# EAGLE board SparkFun Refrigerator Gas Sensor - ZMOD4450-Panel (EAGLE 9.6.0), part 1 of 4
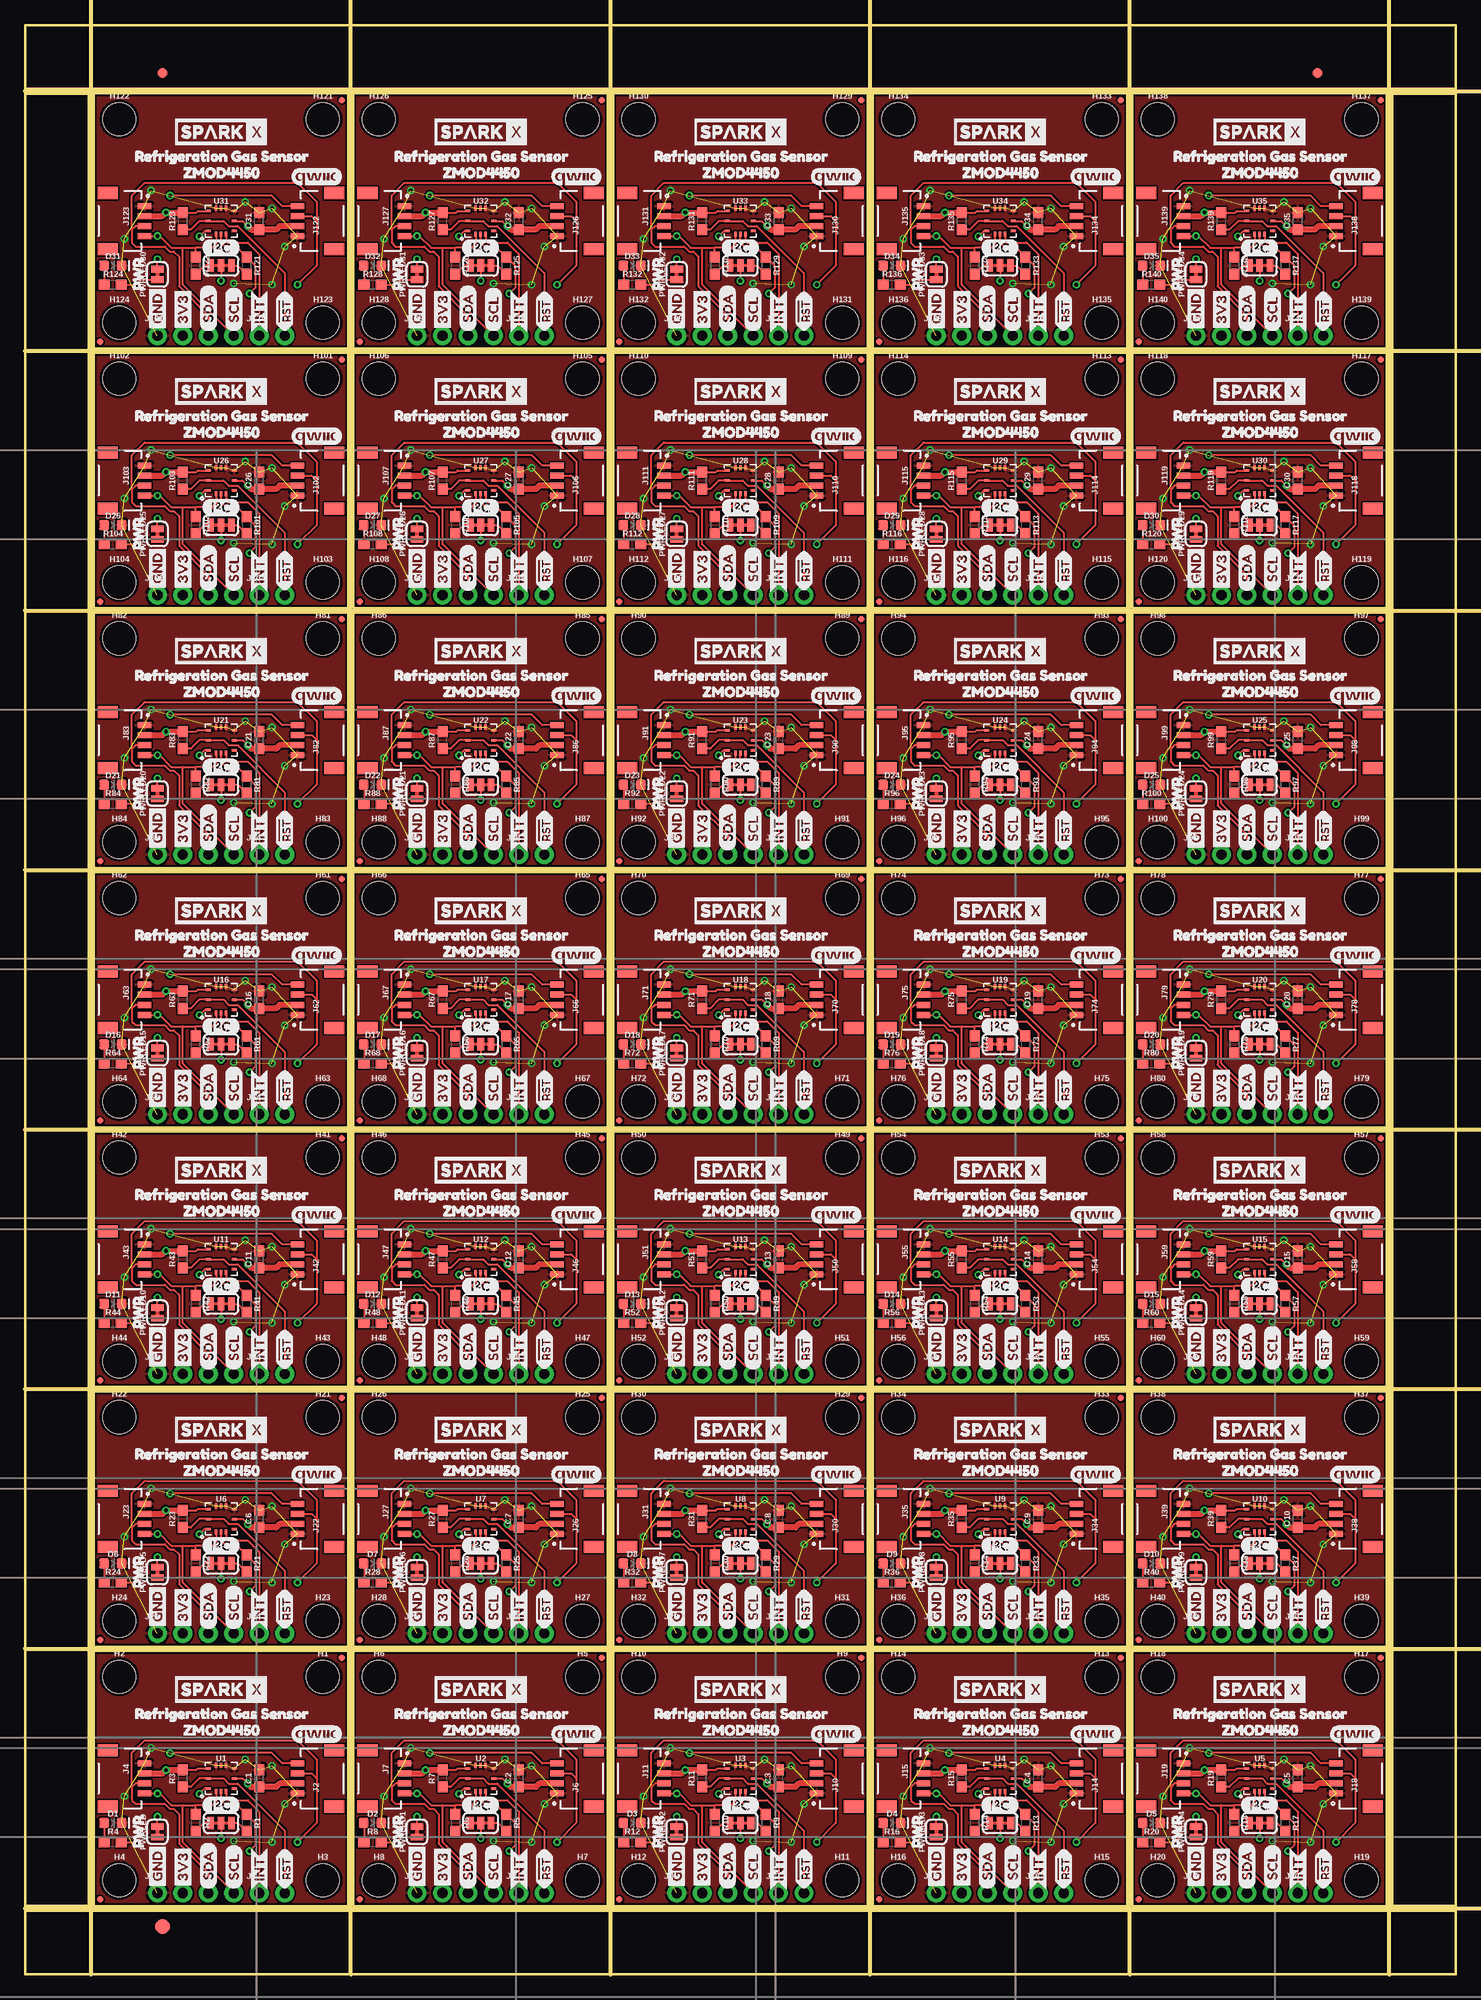
[diagram p0: board, top side]
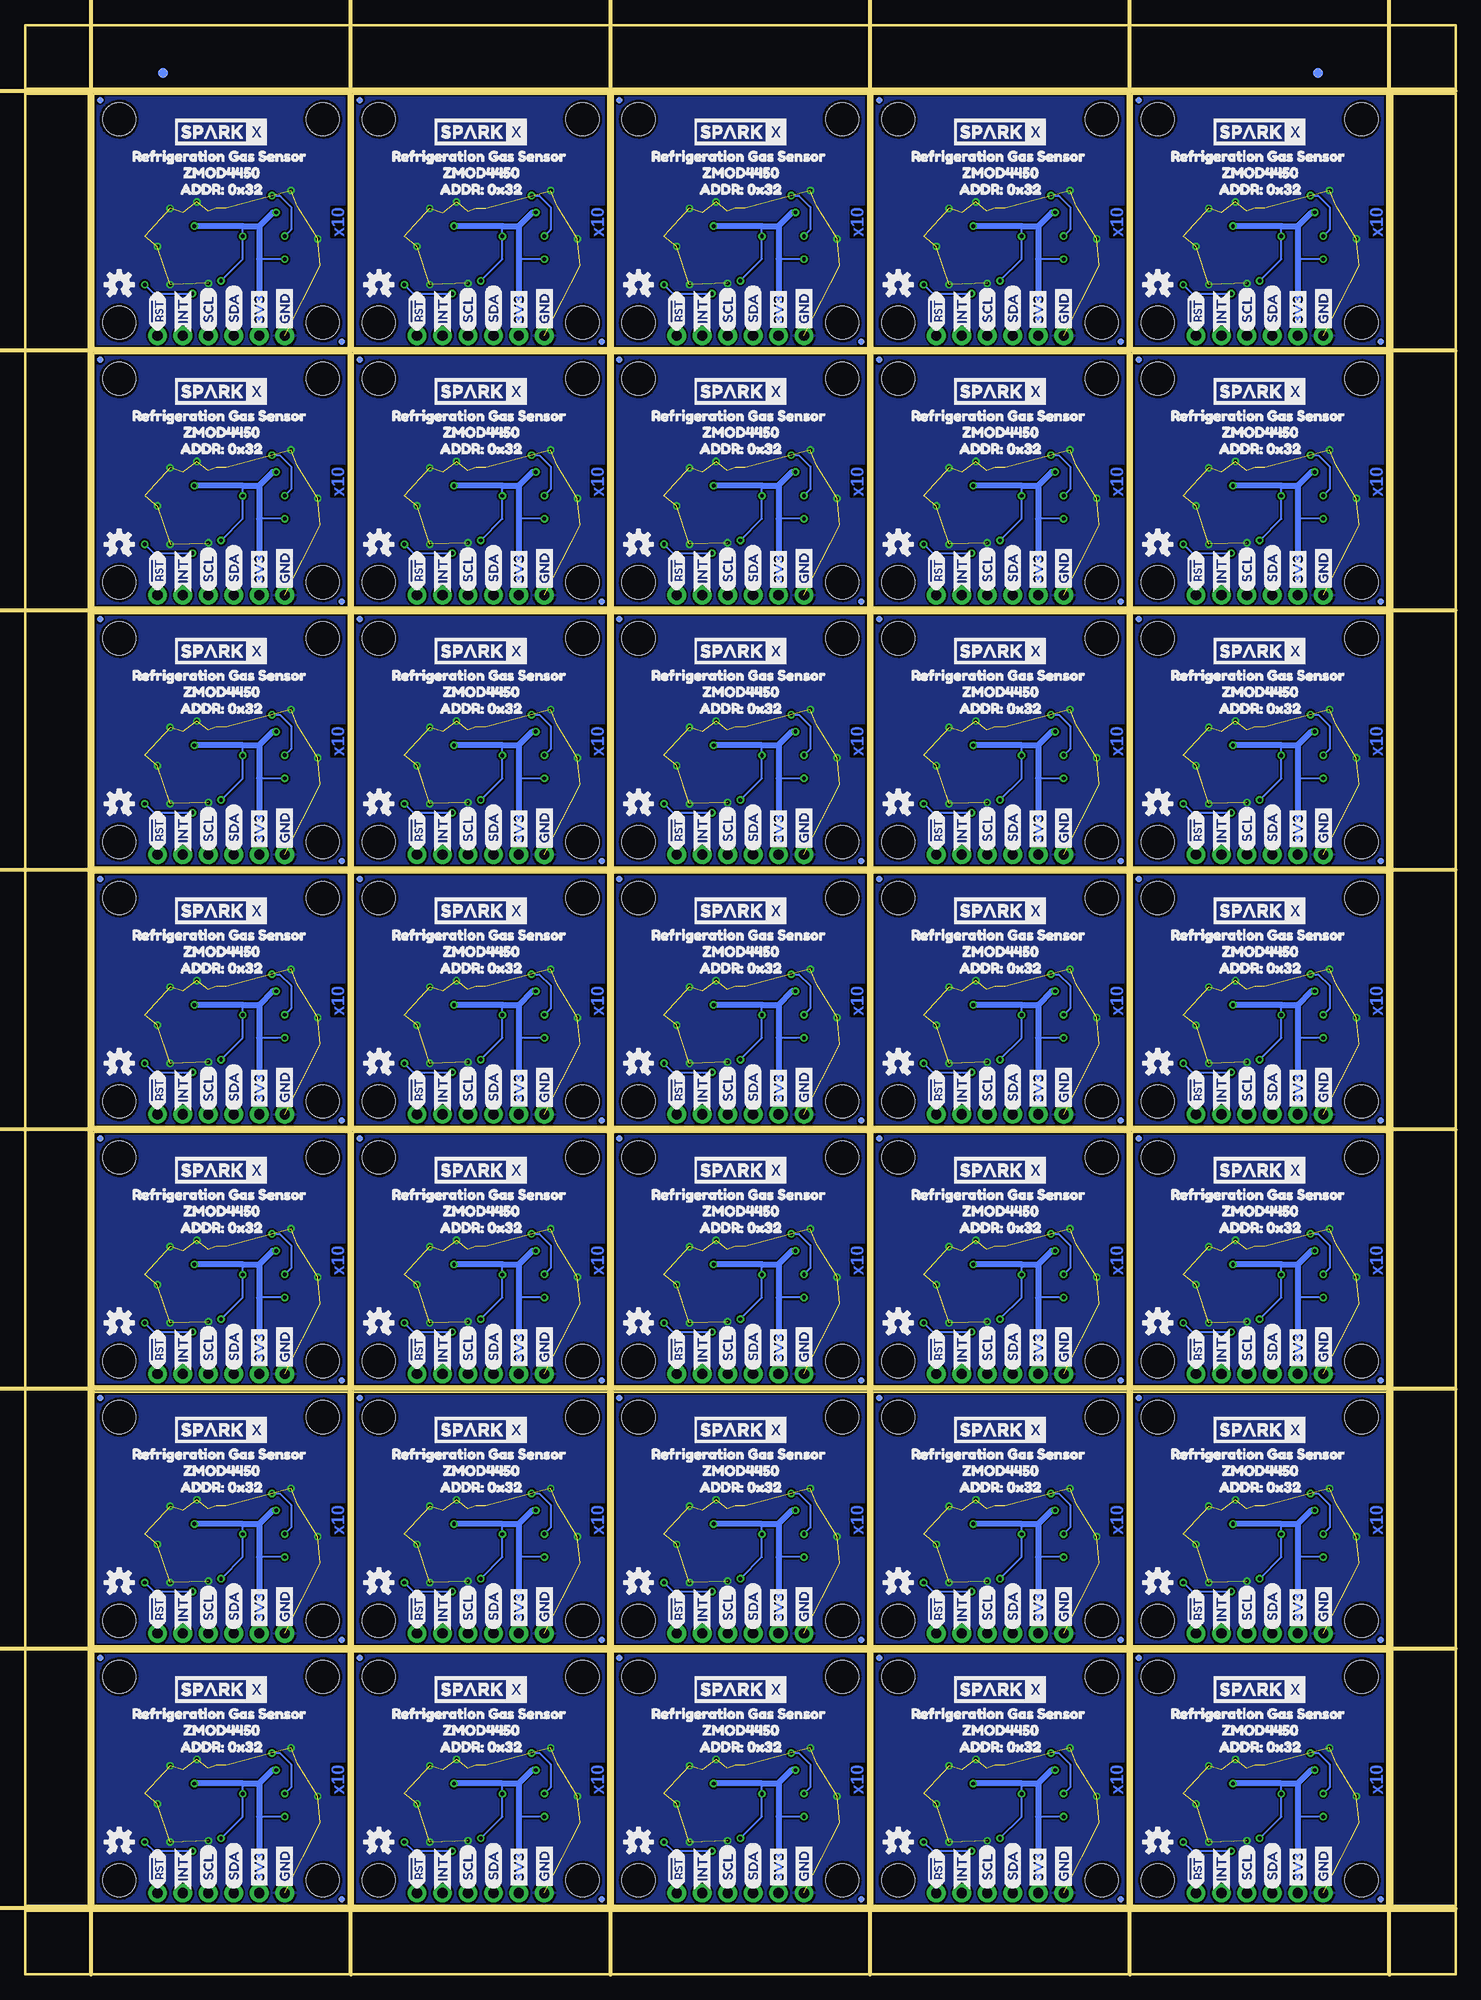
[diagram p1: board, bottom side, seen from below]

Size 142.75 x 194.56 mm. Coordinates in mm from the lower left corner, seen from the top.
Outline: 6.86,6.86 32.26,6.86 32.26,32.26 6.86,32.26 6.86,6.86
Outline: 32.77,6.86 58.17,6.86 58.17,32.26 32.77,32.26 32.77,6.86
Outline: 58.67,6.86 84.07,6.86 84.07,32.26 58.67,32.26 58.67,6.86
Outline: 84.58,6.86 109.98,6.86 109.98,32.26 84.58,32.26 84.58,6.86
Outline: 110.49,6.86 135.89,6.86 135.89,32.26 110.49,32.26 110.49,6.86
Outline: 6.86,32.77 32.26,32.77 32.26,58.17 6.86,58.17 6.86,32.77
Outline: 32.77,32.77 58.17,32.77 58.17,58.17 32.77,58.17 32.77,32.77
Outline: 58.67,32.77 84.07,32.77 84.07,58.17 58.67,58.17 58.67,32.77
Outline: 84.58,32.77 109.98,32.77 109.98,58.17 84.58,58.17 84.58,32.77
Outline: 110.49,32.77 135.89,32.77 135.89,58.17 110.49,58.17 110.49,32.77
Outline: 6.86,58.67 32.26,58.67 32.26,84.07 6.86,84.07 6.86,58.67
Outline: 32.77,58.67 58.17,58.67 58.17,84.07 32.77,84.07 32.77,58.67
Outline: 58.67,58.67 84.07,58.67 84.07,84.07 58.67,84.07 58.67,58.67
Outline: 84.58,58.67 109.98,58.67 109.98,84.07 84.58,84.07 84.58,58.67
Outline: 110.49,58.67 135.89,58.67 135.89,84.07 110.49,84.07 110.49,58.67
Outline: 6.86,84.58 32.26,84.58 32.26,109.98 6.86,109.98 6.86,84.58
Outline: 32.77,84.58 58.17,84.58 58.17,109.98 32.77,109.98 32.77,84.58
Outline: 58.67,84.58 84.07,84.58 84.07,109.98 58.67,109.98 58.67,84.58
Outline: 84.58,84.58 109.98,84.58 109.98,109.98 84.58,109.98 84.58,84.58
Outline: 110.49,84.58 135.89,84.58 135.89,109.98 110.49,109.98 110.49,84.58
Outline: 6.86,110.49 32.26,110.49 32.26,135.89 6.86,135.89 6.86,110.49
Outline: 32.77,110.49 58.17,110.49 58.17,135.89 32.77,135.89 32.77,110.49
Outline: 58.67,110.49 84.07,110.49 84.07,135.89 58.67,135.89 58.67,110.49
Outline: 84.58,110.49 109.98,110.49 109.98,135.89 84.58,135.89 84.58,110.49
Outline: 110.49,110.49 135.89,110.49 135.89,135.89 110.49,135.89 110.49,110.49
Outline: 6.86,136.4 32.26,136.4 32.26,161.8 6.86,161.8 6.86,136.4
Outline: 32.77,136.4 58.17,136.4 58.17,161.8 32.77,161.8 32.77,136.4
Outline: 58.67,136.4 84.07,136.4 84.07,161.8 58.67,161.8 58.67,136.4
Outline: 84.58,136.4 109.98,136.4 109.98,161.8 84.58,161.8 84.58,136.4
Outline: 110.49,136.4 135.89,136.4 135.89,161.8 110.49,161.8 110.49,136.4
Outline: 6.86,162.31 32.26,162.31 32.26,187.71 6.86,187.71 6.86,162.31
Outline: 32.77,162.31 58.17,162.31 58.17,187.71 32.77,187.71 32.77,162.31
Outline: 58.67,162.31 84.07,162.31 84.07,187.71 58.67,187.71 58.67,162.31
Outline: 84.58,162.31 109.98,162.31 109.98,187.71 84.58,187.71 84.58,162.31
Outline: 110.49,162.31 135.89,162.31 135.89,187.71 110.49,187.71 110.49,162.31
Outline: 0,6.35 142.75,6.35 142.75,0 0,0 0,6.35
Outline: 136.4,187.71 142.75,187.71 142.75,6.86 136.4,6.86 136.4,187.71
Outline: 0,194.56 142.75,194.56 142.75,188.21 0,188.21 0,194.56
Outline: 0,187.71 6.35,187.71 6.35,6.86 0,6.86 0,187.71
Copper layers (1*16): Top 0.035mm / dielectric 1.5mm / Bottom 0.035mm
Design rules "SparkFun": minimum track width 7mil, minimum drill 15mil, track to track 7mil, track to pad 7mil, pad to pad 7mil, via to via 7mil, smd to smd 7mil, copper to edge 7mil, drill to drill 7mil, minimum pad ring 7mil, minimum via ring 7mil, stop-mask expansion 4mil, vias tented up to drill 25mil, thermal gap 10mil
Milling: 14 lines

## Footprints (pad centres in the part's own frame; a part is rotated, then mirrored left to right if it is on the bottom)
0603 = smd 1.1 x 1: 1 -0.85,0; 2 0.85,0
LED-0603 = smd 1 x 1: A -0.877,0; C 0.877,0
FIDUCIAL-1X2 = smd 1 x 1: 1 0,0
FIDUCIAL-1.5X3 = smd 1.5 x 1.5: 1 0,0
FIDUCIAL-MICRO = smd 0.635 x 0.635: 1 0,0
STAND-OFF = hole 3.302: 0,0
SMT-JUMPER_3_2-NC_TRACE_SILK = smd 0.66 x 1.27: 1 -1.041,0; 2 0,0; 3 1.041,0
1X04_NO_SILK = drill 1.016 pad 1.88: 1 0,0; 2 2.54,0; 3 5.08,0; 4 7.62,0
JST04_1MM_RA = smd 0.6 x 1.35: 1 -1.5,0; 2 -0.5,0; 3 0.5,0; 4 1.5,0 | smd 1.2 x 2: NC1 2.8,-3.675; NC2 -2.8,-3.675
1X02_NO_SILK = drill 1.016 pad 1.88: 1 0,0; 2 2.54,0
SMT-JUMPER_2_NC_TRACE_SILK = smd 0.66 x 1.27: 1 -0.521,0; 2 0.521,0
LGA-12-3X3 = smd 0.25 x 0.5: 1 -0.5,-1.3; 2 0,-1.3; 3 0.5,-1.3; 7 0.5,1.3; 8 0,1.3; 9 -0.5,1.3 | smd 0.5 x 0.25: 4 1.3,-1; 5 1.3,0; 6 1.3,1; 10 -1.3,1; 11 -1.3,0; 12 -1.3,-1

## Placement (x,y rotation side)
C1  0.1uF  [0603]  23.37,19.56 90 top
C2  0.1uF  [0603]  49.28,19.56 90 top
C3  0.1uF  [0603]  75.18,19.56 90 top
C4  0.1uF  [0603]  101.09,19.56 90 top
C5  0.1uF  [0603]  127,19.56 90 top
C6  0.1uF  [0603]  23.37,45.47 90 top
C7  0.1uF  [0603]  49.28,45.47 90 top
C8  0.1uF  [0603]  75.18,45.47 90 top
C9  0.1uF  [0603]  101.09,45.47 90 top
C10  0.1uF  [0603]  127,45.47 90 top
C11  0.1uF  [0603]  23.37,71.37 90 top
C12  0.1uF  [0603]  49.28,71.37 90 top
C13  0.1uF  [0603]  75.18,71.37 90 top
C14  0.1uF  [0603]  101.09,71.37 90 top
C15  0.1uF  [0603]  127,71.37 90 top
C16  0.1uF  [0603]  23.37,97.28 90 top
C17  0.1uF  [0603]  49.28,97.28 90 top
C18  0.1uF  [0603]  75.18,97.28 90 top
C19  0.1uF  [0603]  101.09,97.28 90 top
C20  0.1uF  [0603]  127,97.28 90 top
C21  0.1uF  [0603]  23.37,123.19 90 top
C22  0.1uF  [0603]  49.28,123.19 90 top
C23  0.1uF  [0603]  75.18,123.19 90 top
C24  0.1uF  [0603]  101.09,123.19 90 top
C25  0.1uF  [0603]  127,123.19 90 top
C26  0.1uF  [0603]  23.37,149.1 90 top
C27  0.1uF  [0603]  49.28,149.1 90 top
C28  0.1uF  [0603]  75.18,149.1 90 top
C29  0.1uF  [0603]  101.09,149.1 90 top
C30  0.1uF  [0603]  127,149.1 90 top
C31  0.1uF  [0603]  23.37,175.01 90 top
C32  0.1uF  [0603]  49.28,175.01 90 top
C33  0.1uF  [0603]  75.18,175.01 90 top
C34  0.1uF  [0603]  101.09,175.01 90 top
C35  0.1uF  [0603]  127,175.01 90 top
D1  RED  [LED-0603]  8.76,15.11 0 top
D2  RED  [LED-0603]  34.67,15.11 0 top
D3  RED  [LED-0603]  60.58,15.11 0 top
D4  RED  [LED-0603]  86.49,15.11 0 top
D5  RED  [LED-0603]  112.4,15.11 0 top
D6  RED  [LED-0603]  8.76,41.02 0 top
D7  RED  [LED-0603]  34.67,41.02 0 top
D8  RED  [LED-0603]  60.58,41.02 0 top
D9  RED  [LED-0603]  86.49,41.02 0 top
D10  RED  [LED-0603]  112.4,41.02 0 top
D11  RED  [LED-0603]  8.76,66.93 0 top
D12  RED  [LED-0603]  34.67,66.93 0 top
D13  RED  [LED-0603]  60.58,66.93 0 top
D14  RED  [LED-0603]  86.49,66.93 0 top
D15  RED  [LED-0603]  112.4,66.93 0 top
D16  RED  [LED-0603]  8.76,92.84 0 top
D17  RED  [LED-0603]  34.67,92.84 0 top
D18  RED  [LED-0603]  60.58,92.84 0 top
D19  RED  [LED-0603]  86.49,92.84 0 top
D20  RED  [LED-0603]  112.4,92.84 0 top
D21  RED  [LED-0603]  8.76,118.75 0 top
D22  RED  [LED-0603]  34.67,118.75 0 top
D23  RED  [LED-0603]  60.58,118.75 0 top
D24  RED  [LED-0603]  86.49,118.75 0 top
D25  RED  [LED-0603]  112.4,118.75 0 top
D26  RED  [LED-0603]  8.76,144.65 0 top
D27  RED  [LED-0603]  34.67,144.65 0 top
D28  RED  [LED-0603]  60.58,144.65 0 top
D29  RED  [LED-0603]  86.49,144.65 0 top
D30  RED  [LED-0603]  112.4,144.65 0 top
D31  RED  [LED-0603]  8.76,170.56 0 top
D32  RED  [LED-0603]  34.67,170.56 0 top
D33  RED  [LED-0603]  60.58,170.56 0 top
D34  RED  [LED-0603]  86.49,170.56 0 top
D35  RED  [LED-0603]  112.4,170.56 0 top
E$1  [FIDUCIAL-1X2]  13.72,189.8 0 top
E$2  [FIDUCIAL-1X2]  13.72,189.8 0 bottom
E$3  [FIDUCIAL-1X2]  128.97,189.8 0 top
E$4  [FIDUCIAL-1X2]  128.97,189.8 0 bottom
E$5  [FIDUCIAL-1.5X3]  13.72,4.76 0 top
FD1  FIDUCIALUFIDUCIAL  [FIDUCIAL-MICRO]  31.62,31.62 0 top
FD2  FIDUCIALUFIDUCIAL  [FIDUCIAL-MICRO]  7.49,7.49 0 bottom
FD3  FIDUCIALUFIDUCIAL  [FIDUCIAL-MICRO]  7.49,7.49 0 top
FD4  FIDUCIALUFIDUCIAL  [FIDUCIAL-MICRO]  31.62,31.62 0 bottom
FD5  FIDUCIALUFIDUCIAL  [FIDUCIAL-MICRO]  57.53,31.62 0 top
FD6  FIDUCIALUFIDUCIAL  [FIDUCIAL-MICRO]  33.4,7.49 0 bottom
FD7  FIDUCIALUFIDUCIAL  [FIDUCIAL-MICRO]  33.4,7.49 0 top
FD8  FIDUCIALUFIDUCIAL  [FIDUCIAL-MICRO]  57.53,31.62 0 bottom
FD9  FIDUCIALUFIDUCIAL  [FIDUCIAL-MICRO]  83.44,31.62 0 top
FD10  FIDUCIALUFIDUCIAL  [FIDUCIAL-MICRO]  59.31,7.49 0 bottom
FD11  FIDUCIALUFIDUCIAL  [FIDUCIAL-MICRO]  59.31,7.49 0 top
FD12  FIDUCIALUFIDUCIAL  [FIDUCIAL-MICRO]  83.44,31.62 0 bottom
FD13  FIDUCIALUFIDUCIAL  [FIDUCIAL-MICRO]  109.35,31.62 0 top
FD14  FIDUCIALUFIDUCIAL  [FIDUCIAL-MICRO]  85.22,7.49 0 bottom
FD15  FIDUCIALUFIDUCIAL  [FIDUCIAL-MICRO]  85.22,7.49 0 top
FD16  FIDUCIALUFIDUCIAL  [FIDUCIAL-MICRO]  109.35,31.62 0 bottom
FD17  FIDUCIALUFIDUCIAL  [FIDUCIAL-MICRO]  135.25,31.62 0 top
FD18  FIDUCIALUFIDUCIAL  [FIDUCIAL-MICRO]  111.12,7.49 0 bottom
FD19  FIDUCIALUFIDUCIAL  [FIDUCIAL-MICRO]  111.12,7.49 0 top
FD20  FIDUCIALUFIDUCIAL  [FIDUCIAL-MICRO]  135.25,31.62 0 bottom
FD21  FIDUCIALUFIDUCIAL  [FIDUCIAL-MICRO]  31.62,57.53 0 top
FD22  FIDUCIALUFIDUCIAL  [FIDUCIAL-MICRO]  7.49,33.4 0 bottom
FD23  FIDUCIALUFIDUCIAL  [FIDUCIAL-MICRO]  7.49,33.4 0 top
FD24  FIDUCIALUFIDUCIAL  [FIDUCIAL-MICRO]  31.62,57.53 0 bottom
FD25  FIDUCIALUFIDUCIAL  [FIDUCIAL-MICRO]  57.53,57.53 0 top
FD26  FIDUCIALUFIDUCIAL  [FIDUCIAL-MICRO]  33.4,33.4 0 bottom
FD27  FIDUCIALUFIDUCIAL  [FIDUCIAL-MICRO]  33.4,33.4 0 top
FD28  FIDUCIALUFIDUCIAL  [FIDUCIAL-MICRO]  57.53,57.53 0 bottom
FD29  FIDUCIALUFIDUCIAL  [FIDUCIAL-MICRO]  83.44,57.53 0 top
FD30  FIDUCIALUFIDUCIAL  [FIDUCIAL-MICRO]  59.31,33.4 0 bottom
FD31  FIDUCIALUFIDUCIAL  [FIDUCIAL-MICRO]  59.31,33.4 0 top
FD32  FIDUCIALUFIDUCIAL  [FIDUCIAL-MICRO]  83.44,57.53 0 bottom
FD33  FIDUCIALUFIDUCIAL  [FIDUCIAL-MICRO]  109.35,57.53 0 top
FD34  FIDUCIALUFIDUCIAL  [FIDUCIAL-MICRO]  85.22,33.4 0 bottom
FD35  FIDUCIALUFIDUCIAL  [FIDUCIAL-MICRO]  85.22,33.4 0 top
FD36  FIDUCIALUFIDUCIAL  [FIDUCIAL-MICRO]  109.35,57.53 0 bottom
FD37  FIDUCIALUFIDUCIAL  [FIDUCIAL-MICRO]  135.25,57.53 0 top
FD38  FIDUCIALUFIDUCIAL  [FIDUCIAL-MICRO]  111.12,33.4 0 bottom
FD39  FIDUCIALUFIDUCIAL  [FIDUCIAL-MICRO]  111.12,33.4 0 top
FD40  FIDUCIALUFIDUCIAL  [FIDUCIAL-MICRO]  135.25,57.53 0 bottom
FD41  FIDUCIALUFIDUCIAL  [FIDUCIAL-MICRO]  31.62,83.44 0 top
FD42  FIDUCIALUFIDUCIAL  [FIDUCIAL-MICRO]  7.49,59.31 0 bottom
FD43  FIDUCIALUFIDUCIAL  [FIDUCIAL-MICRO]  7.49,59.31 0 top
FD44  FIDUCIALUFIDUCIAL  [FIDUCIAL-MICRO]  31.62,83.44 0 bottom
FD45  FIDUCIALUFIDUCIAL  [FIDUCIAL-MICRO]  57.53,83.44 0 top
FD46  FIDUCIALUFIDUCIAL  [FIDUCIAL-MICRO]  33.4,59.31 0 bottom
FD47  FIDUCIALUFIDUCIAL  [FIDUCIAL-MICRO]  33.4,59.31 0 top
FD48  FIDUCIALUFIDUCIAL  [FIDUCIAL-MICRO]  57.53,83.44 0 bottom
FD49  FIDUCIALUFIDUCIAL  [FIDUCIAL-MICRO]  83.44,83.44 0 top
FD50  FIDUCIALUFIDUCIAL  [FIDUCIAL-MICRO]  59.31,59.31 0 bottom
FD51  FIDUCIALUFIDUCIAL  [FIDUCIAL-MICRO]  59.31,59.31 0 top
FD52  FIDUCIALUFIDUCIAL  [FIDUCIAL-MICRO]  83.44,83.44 0 bottom
FD53  FIDUCIALUFIDUCIAL  [FIDUCIAL-MICRO]  109.35,83.44 0 top
FD54  FIDUCIALUFIDUCIAL  [FIDUCIAL-MICRO]  85.22,59.31 0 bottom
FD55  FIDUCIALUFIDUCIAL  [FIDUCIAL-MICRO]  85.22,59.31 0 top
FD56  FIDUCIALUFIDUCIAL  [FIDUCIAL-MICRO]  109.35,83.44 0 bottom
FD57  FIDUCIALUFIDUCIAL  [FIDUCIAL-MICRO]  135.25,83.44 0 top
FD58  FIDUCIALUFIDUCIAL  [FIDUCIAL-MICRO]  111.12,59.31 0 bottom
FD59  FIDUCIALUFIDUCIAL  [FIDUCIAL-MICRO]  111.12,59.31 0 top
FD60  FIDUCIALUFIDUCIAL  [FIDUCIAL-MICRO]  135.25,83.44 0 bottom
FD61  FIDUCIALUFIDUCIAL  [FIDUCIAL-MICRO]  31.62,109.35 0 top
FD62  FIDUCIALUFIDUCIAL  [FIDUCIAL-MICRO]  7.49,85.22 0 bottom
FD63  FIDUCIALUFIDUCIAL  [FIDUCIAL-MICRO]  7.49,85.22 0 top
FD64  FIDUCIALUFIDUCIAL  [FIDUCIAL-MICRO]  31.62,109.35 0 bottom
FD65  FIDUCIALUFIDUCIAL  [FIDUCIAL-MICRO]  57.53,109.35 0 top
FD66  FIDUCIALUFIDUCIAL  [FIDUCIAL-MICRO]  33.4,85.22 0 bottom
FD67  FIDUCIALUFIDUCIAL  [FIDUCIAL-MICRO]  33.4,85.22 0 top
FD68  FIDUCIALUFIDUCIAL  [FIDUCIAL-MICRO]  57.53,109.35 0 bottom
FD69  FIDUCIALUFIDUCIAL  [FIDUCIAL-MICRO]  83.44,109.35 0 top
FD70  FIDUCIALUFIDUCIAL  [FIDUCIAL-MICRO]  59.31,85.22 0 bottom
FD71  FIDUCIALUFIDUCIAL  [FIDUCIAL-MICRO]  59.31,85.22 0 top
FD72  FIDUCIALUFIDUCIAL  [FIDUCIAL-MICRO]  83.44,109.35 0 bottom
FD73  FIDUCIALUFIDUCIAL  [FIDUCIAL-MICRO]  109.35,109.35 0 top
FD74  FIDUCIALUFIDUCIAL  [FIDUCIAL-MICRO]  85.22,85.22 0 bottom
FD75  FIDUCIALUFIDUCIAL  [FIDUCIAL-MICRO]  85.22,85.22 0 top
FD76  FIDUCIALUFIDUCIAL  [FIDUCIAL-MICRO]  109.35,109.35 0 bottom
FD77  FIDUCIALUFIDUCIAL  [FIDUCIAL-MICRO]  135.25,109.35 0 top
FD78  FIDUCIALUFIDUCIAL  [FIDUCIAL-MICRO]  111.12,85.22 0 bottom
FD79  FIDUCIALUFIDUCIAL  [FIDUCIAL-MICRO]  111.12,85.22 0 top
FD80  FIDUCIALUFIDUCIAL  [FIDUCIAL-MICRO]  135.25,109.35 0 bottom
FD81  FIDUCIALUFIDUCIAL  [FIDUCIAL-MICRO]  31.62,135.25 0 top
FD82  FIDUCIALUFIDUCIAL  [FIDUCIAL-MICRO]  7.49,111.12 0 bottom
FD83  FIDUCIALUFIDUCIAL  [FIDUCIAL-MICRO]  7.49,111.12 0 top
FD84  FIDUCIALUFIDUCIAL  [FIDUCIAL-MICRO]  31.62,135.25 0 bottom
FD85  FIDUCIALUFIDUCIAL  [FIDUCIAL-MICRO]  57.53,135.25 0 top
FD86  FIDUCIALUFIDUCIAL  [FIDUCIAL-MICRO]  33.4,111.12 0 bottom
FD87  FIDUCIALUFIDUCIAL  [FIDUCIAL-MICRO]  33.4,111.12 0 top
FD88  FIDUCIALUFIDUCIAL  [FIDUCIAL-MICRO]  57.53,135.25 0 bottom
FD89  FIDUCIALUFIDUCIAL  [FIDUCIAL-MICRO]  83.44,135.25 0 top
FD90  FIDUCIALUFIDUCIAL  [FIDUCIAL-MICRO]  59.31,111.12 0 bottom
FD91  FIDUCIALUFIDUCIAL  [FIDUCIAL-MICRO]  59.31,111.12 0 top
FD92  FIDUCIALUFIDUCIAL  [FIDUCIAL-MICRO]  83.44,135.25 0 bottom
FD93  FIDUCIALUFIDUCIAL  [FIDUCIAL-MICRO]  109.35,135.25 0 top
FD94  FIDUCIALUFIDUCIAL  [FIDUCIAL-MICRO]  85.22,111.12 0 bottom
FD95  FIDUCIALUFIDUCIAL  [FIDUCIAL-MICRO]  85.22,111.12 0 top
FD96  FIDUCIALUFIDUCIAL  [FIDUCIAL-MICRO]  109.35,135.25 0 bottom
FD97  FIDUCIALUFIDUCIAL  [FIDUCIAL-MICRO]  135.25,135.25 0 top
FD98  FIDUCIALUFIDUCIAL  [FIDUCIAL-MICRO]  111.12,111.12 0 bottom
FD99  FIDUCIALUFIDUCIAL  [FIDUCIAL-MICRO]  111.12,111.12 0 top
FD100  FIDUCIALUFIDUCIAL  [FIDUCIAL-MICRO]  135.25,135.25 0 bottom
FD101  FIDUCIALUFIDUCIAL  [FIDUCIAL-MICRO]  31.62,161.16 0 top
FD102  FIDUCIALUFIDUCIAL  [FIDUCIAL-MICRO]  7.49,137.03 0 bottom
FD103  FIDUCIALUFIDUCIAL  [FIDUCIAL-MICRO]  7.49,137.03 0 top
FD104  FIDUCIALUFIDUCIAL  [FIDUCIAL-MICRO]  31.62,161.16 0 bottom
FD105  FIDUCIALUFIDUCIAL  [FIDUCIAL-MICRO]  57.53,161.16 0 top
FD106  FIDUCIALUFIDUCIAL  [FIDUCIAL-MICRO]  33.4,137.03 0 bottom
FD107  FIDUCIALUFIDUCIAL  [FIDUCIAL-MICRO]  33.4,137.03 0 top
FD108  FIDUCIALUFIDUCIAL  [FIDUCIAL-MICRO]  57.53,161.16 0 bottom
FD109  FIDUCIALUFIDUCIAL  [FIDUCIAL-MICRO]  83.44,161.16 0 top
FD110  FIDUCIALUFIDUCIAL  [FIDUCIAL-MICRO]  59.31,137.03 0 bottom
FD111  FIDUCIALUFIDUCIAL  [FIDUCIAL-MICRO]  59.31,137.03 0 top
FD112  FIDUCIALUFIDUCIAL  [FIDUCIAL-MICRO]  83.44,161.16 0 bottom
FD113  FIDUCIALUFIDUCIAL  [FIDUCIAL-MICRO]  109.35,161.16 0 top
FD114  FIDUCIALUFIDUCIAL  [FIDUCIAL-MICRO]  85.22,137.03 0 bottom
FD115  FIDUCIALUFIDUCIAL  [FIDUCIAL-MICRO]  85.22,137.03 0 top
FD116  FIDUCIALUFIDUCIAL  [FIDUCIAL-MICRO]  109.35,161.16 0 bottom
FD117  FIDUCIALUFIDUCIAL  [FIDUCIAL-MICRO]  135.25,161.16 0 top
FD118  FIDUCIALUFIDUCIAL  [FIDUCIAL-MICRO]  111.12,137.03 0 bottom
FD119  FIDUCIALUFIDUCIAL  [FIDUCIAL-MICRO]  111.12,137.03 0 top
FD120  FIDUCIALUFIDUCIAL  [FIDUCIAL-MICRO]  135.25,161.16 0 bottom
FD121  FIDUCIALUFIDUCIAL  [FIDUCIAL-MICRO]  31.62,187.07 0 top
FD122  FIDUCIALUFIDUCIAL  [FIDUCIAL-MICRO]  7.49,162.94 0 bottom
FD123  FIDUCIALUFIDUCIAL  [FIDUCIAL-MICRO]  7.49,162.94 0 top
FD124  FIDUCIALUFIDUCIAL  [FIDUCIAL-MICRO]  31.62,187.07 0 bottom
FD125  FIDUCIALUFIDUCIAL  [FIDUCIAL-MICRO]  57.53,187.07 0 top
FD126  FIDUCIALUFIDUCIAL  [FIDUCIAL-MICRO]  33.4,162.94 0 bottom
FD127  FIDUCIALUFIDUCIAL  [FIDUCIAL-MICRO]  33.4,162.94 0 top
FD128  FIDUCIALUFIDUCIAL  [FIDUCIAL-MICRO]  57.53,187.07 0 bottom
FD129  FIDUCIALUFIDUCIAL  [FIDUCIAL-MICRO]  83.44,187.07 0 top
FD130  FIDUCIALUFIDUCIAL  [FIDUCIAL-MICRO]  59.31,162.94 0 bottom
FD131  FIDUCIALUFIDUCIAL  [FIDUCIAL-MICRO]  59.31,162.94 0 top
FD132  FIDUCIALUFIDUCIAL  [FIDUCIAL-MICRO]  83.44,187.07 0 bottom
FD133  FIDUCIALUFIDUCIAL  [FIDUCIAL-MICRO]  109.35,187.07 0 top
FD134  FIDUCIALUFIDUCIAL  [FIDUCIAL-MICRO]  85.22,162.94 0 bottom
FD135  FIDUCIALUFIDUCIAL  [FIDUCIAL-MICRO]  85.22,162.94 0 top
FD136  FIDUCIALUFIDUCIAL  [FIDUCIAL-MICRO]  109.35,187.07 0 bottom
FD137  FIDUCIALUFIDUCIAL  [FIDUCIAL-MICRO]  135.25,187.07 0 top
FD138  FIDUCIALUFIDUCIAL  [FIDUCIAL-MICRO]  111.12,162.94 0 bottom
FD139  FIDUCIALUFIDUCIAL  [FIDUCIAL-MICRO]  111.12,162.94 0 top
FD140  FIDUCIALUFIDUCIAL  [FIDUCIAL-MICRO]  135.25,187.07 0 bottom
FRAME1  FRAME-LETTER  [CREATIVE_COMMONS]  -3.3,-2.03 0 top  (outside the outline)
FRAME2  FRAME-LETTER  [CREATIVE_COMMONS]  22.61,-2.03 0 top
FRAME3  FRAME-LETTER  [CREATIVE_COMMONS]  48.51,-2.03 0 top
FRAME4  FRAME-LETTER  [CREATIVE_COMMONS]  74.42,-2.03 0 top
FRAME5  FRAME-LETTER  [CREATIVE_COMMONS]  100.33,-2.03 0 top
FRAME6  FRAME-LETTER  [CREATIVE_COMMONS]  -3.3,23.88 0 top  (outside the outline)
FRAME7  FRAME-LETTER  [CREATIVE_COMMONS]  22.61,23.88 0 top
FRAME8  FRAME-LETTER  [CREATIVE_COMMONS]  48.51,23.88 0 top
FRAME9  FRAME-LETTER  [CREATIVE_COMMONS]  74.42,23.88 0 top
FRAME10  FRAME-LETTER  [CREATIVE_COMMONS]  100.33,23.88 0 top
FRAME11  FRAME-LETTER  [CREATIVE_COMMONS]  -3.3,49.78 0 top  (outside the outline)
FRAME12  FRAME-LETTER  [CREATIVE_COMMONS]  22.61,49.78 0 top
FRAME13  FRAME-LETTER  [CREATIVE_COMMONS]  48.51,49.78 0 top
FRAME14  FRAME-LETTER  [CREATIVE_COMMONS]  74.42,49.78 0 top
FRAME15  FRAME-LETTER  [CREATIVE_COMMONS]  100.33,49.78 0 top
FRAME16  FRAME-LETTER  [CREATIVE_COMMONS]  -3.3,75.69 0 top  (outside the outline)
FRAME17  FRAME-LETTER  [CREATIVE_COMMONS]  22.61,75.69 0 top
FRAME18  FRAME-LETTER  [CREATIVE_COMMONS]  48.51,75.69 0 top
FRAME19  FRAME-LETTER  [CREATIVE_COMMONS]  74.42,75.69 0 top
FRAME20  FRAME-LETTER  [CREATIVE_COMMONS]  100.33,75.69 0 top
FRAME21  FRAME-LETTER  [CREATIVE_COMMONS]  -3.3,101.6 0 top  (outside the outline)
FRAME22  FRAME-LETTER  [CREATIVE_COMMONS]  22.61,101.6 0 top
FRAME23  FRAME-LETTER  [CREATIVE_COMMONS]  48.51,101.6 0 top
FRAME24  FRAME-LETTER  [CREATIVE_COMMONS]  74.42,101.6 0 top
FRAME25  FRAME-LETTER  [CREATIVE_COMMONS]  100.33,101.6 0 top
FRAME26  FRAME-LETTER  [CREATIVE_COMMONS]  -3.3,127.51 0 top  (outside the outline)
FRAME27  FRAME-LETTER  [CREATIVE_COMMONS]  22.61,127.51 0 top
FRAME28  FRAME-LETTER  [CREATIVE_COMMONS]  48.51,127.51 0 top
FRAME29  FRAME-LETTER  [CREATIVE_COMMONS]  74.42,127.51 0 top
FRAME30  FRAME-LETTER  [CREATIVE_COMMONS]  100.33,127.51 0 top
FRAME31  FRAME-LETTER  [CREATIVE_COMMONS]  -3.3,153.42 0 top  (outside the outline)
FRAME32  FRAME-LETTER  [CREATIVE_COMMONS]  22.61,153.42 0 top
FRAME33  FRAME-LETTER  [CREATIVE_COMMONS]  48.51,153.42 0 top
FRAME34  FRAME-LETTER  [CREATIVE_COMMONS]  74.42,153.42 0 top
FRAME35  FRAME-LETTER  [CREATIVE_COMMONS]  100.33,153.42 0 top
H1  STAND-OFF  [STAND-OFF]  29.72,29.72 0 top
H2  STAND-OFF  [STAND-OFF]  9.4,29.72 0 top
H3  STAND-OFF  [STAND-OFF]  29.72,9.4 0 top
H4  STAND-OFF  [STAND-OFF]  9.4,9.4 0 top
H5  STAND-OFF  [STAND-OFF]  55.63,29.72 0 top
H6  STAND-OFF  [STAND-OFF]  35.31,29.72 0 top
H7  STAND-OFF  [STAND-OFF]  55.63,9.4 0 top
H8  STAND-OFF  [STAND-OFF]  35.31,9.4 0 top
H9  STAND-OFF  [STAND-OFF]  81.53,29.72 0 top
H10  STAND-OFF  [STAND-OFF]  61.21,29.72 0 top
H11  STAND-OFF  [STAND-OFF]  81.53,9.4 0 top
H12  STAND-OFF  [STAND-OFF]  61.21,9.4 0 top
H13  STAND-OFF  [STAND-OFF]  107.44,29.72 0 top
H14  STAND-OFF  [STAND-OFF]  87.12,29.72 0 top
H15  STAND-OFF  [STAND-OFF]  107.44,9.4 0 top
H16  STAND-OFF  [STAND-OFF]  87.12,9.4 0 top
H17  STAND-OFF  [STAND-OFF]  133.35,29.72 0 top
H18  STAND-OFF  [STAND-OFF]  113.03,29.72 0 top
H19  STAND-OFF  [STAND-OFF]  133.35,9.4 0 top
H20  STAND-OFF  [STAND-OFF]  113.03,9.4 0 top
H21  STAND-OFF  [STAND-OFF]  29.72,55.63 0 top
H22  STAND-OFF  [STAND-OFF]  9.4,55.63 0 top
H23  STAND-OFF  [STAND-OFF]  29.72,35.31 0 top
H24  STAND-OFF  [STAND-OFF]  9.4,35.31 0 top
H25  STAND-OFF  [STAND-OFF]  55.63,55.63 0 top
H26  STAND-OFF  [STAND-OFF]  35.31,55.63 0 top
H27  STAND-OFF  [STAND-OFF]  55.63,35.31 0 top
H28  STAND-OFF  [STAND-OFF]  35.31,35.31 0 top
H29  STAND-OFF  [STAND-OFF]  81.53,55.63 0 top
H30  STAND-OFF  [STAND-OFF]  61.21,55.63 0 top
H31  STAND-OFF  [STAND-OFF]  81.53,35.31 0 top
H32  STAND-OFF  [STAND-OFF]  61.21,35.31 0 top
H33  STAND-OFF  [STAND-OFF]  107.44,55.63 0 top
H34  STAND-OFF  [STAND-OFF]  87.12,55.63 0 top
H35  STAND-OFF  [STAND-OFF]  107.44,35.31 0 top
H36  STAND-OFF  [STAND-OFF]  87.12,35.31 0 top
H37  STAND-OFF  [STAND-OFF]  133.35,55.63 0 top
H38  STAND-OFF  [STAND-OFF]  113.03,55.63 0 top
H39  STAND-OFF  [STAND-OFF]  133.35,35.31 0 top
H40  STAND-OFF  [STAND-OFF]  113.03,35.31 0 top
H41  STAND-OFF  [STAND-OFF]  29.72,81.53 0 top
H42  STAND-OFF  [STAND-OFF]  9.4,81.53 0 top
H43  STAND-OFF  [STAND-OFF]  29.72,61.21 0 top
H44  STAND-OFF  [STAND-OFF]  9.4,61.21 0 top
H45  STAND-OFF  [STAND-OFF]  55.63,81.53 0 top
H46  STAND-OFF  [STAND-OFF]  35.31,81.53 0 top
H47  STAND-OFF  [STAND-OFF]  55.63,61.21 0 top
H48  STAND-OFF  [STAND-OFF]  35.31,61.21 0 top
H49  STAND-OFF  [STAND-OFF]  81.53,81.53 0 top
H50  STAND-OFF  [STAND-OFF]  61.21,81.53 0 top
H51  STAND-OFF  [STAND-OFF]  81.53,61.21 0 top
H52  STAND-OFF  [STAND-OFF]  61.21,61.21 0 top
H53  STAND-OFF  [STAND-OFF]  107.44,81.53 0 top
H54  STAND-OFF  [STAND-OFF]  87.12,81.53 0 top
H55  STAND-OFF  [STAND-OFF]  107.44,61.21 0 top
H56  STAND-OFF  [STAND-OFF]  87.12,61.21 0 top
H57  STAND-OFF  [STAND-OFF]  133.35,81.53 0 top
H58  STAND-OFF  [STAND-OFF]  113.03,81.53 0 top
H59  STAND-OFF  [STAND-OFF]  133.35,61.21 0 top
H60  STAND-OFF  [STAND-OFF]  113.03,61.21 0 top
H61  STAND-OFF  [STAND-OFF]  29.72,107.44 0 top
H62  STAND-OFF  [STAND-OFF]  9.4,107.44 0 top
H63  STAND-OFF  [STAND-OFF]  29.72,87.12 0 top
H64  STAND-OFF  [STAND-OFF]  9.4,87.12 0 top
H65  STAND-OFF  [STAND-OFF]  55.63,107.44 0 top
H66  STAND-OFF  [STAND-OFF]  35.31,107.44 0 top
H67  STAND-OFF  [STAND-OFF]  55.63,87.12 0 top
H68  STAND-OFF  [STAND-OFF]  35.31,87.12 0 top
H69  STAND-OFF  [STAND-OFF]  81.53,107.44 0 top
H70  STAND-OFF  [STAND-OFF]  61.21,107.44 0 top
H71  STAND-OFF  [STAND-OFF]  81.53,87.12 0 top
H72  STAND-OFF  [STAND-OFF]  61.21,87.12 0 top
H73  STAND-OFF  [STAND-OFF]  107.44,107.44 0 top
H74  STAND-OFF  [STAND-OFF]  87.12,107.44 0 top
H75  STAND-OFF  [STAND-OFF]  107.44,87.12 0 top
H76  STAND-OFF  [STAND-OFF]  87.12,87.12 0 top
H77  STAND-OFF  [STAND-OFF]  133.35,107.44 0 top
H78  STAND-OFF  [STAND-OFF]  113.03,107.44 0 top
H79  STAND-OFF  [STAND-OFF]  133.35,87.12 0 top
H80  STAND-OFF  [STAND-OFF]  113.03,87.12 0 top
H81  STAND-OFF  [STAND-OFF]  29.72,133.35 0 top
H82  STAND-OFF  [STAND-OFF]  9.4,133.35 0 top
H83  STAND-OFF  [STAND-OFF]  29.72,113.03 0 top
H84  STAND-OFF  [STAND-OFF]  9.4,113.03 0 top
H85  STAND-OFF  [STAND-OFF]  55.63,133.35 0 top
H86  STAND-OFF  [STAND-OFF]  35.31,133.35 0 top
H87  STAND-OFF  [STAND-OFF]  55.63,113.03 0 top
H88  STAND-OFF  [STAND-OFF]  35.31,113.03 0 top
H89  STAND-OFF  [STAND-OFF]  81.53,133.35 0 top
H90  STAND-OFF  [STAND-OFF]  61.21,133.35 0 top
H91  STAND-OFF  [STAND-OFF]  81.53,113.03 0 top
H92  STAND-OFF  [STAND-OFF]  61.21,113.03 0 top
H93  STAND-OFF  [STAND-OFF]  107.44,133.35 0 top
H94  STAND-OFF  [STAND-OFF]  87.12,133.35 0 top
H95  STAND-OFF  [STAND-OFF]  107.44,113.03 0 top
H96  STAND-OFF  [STAND-OFF]  87.12,113.03 0 top
H97  STAND-OFF  [STAND-OFF]  133.35,133.35 0 top
H98  STAND-OFF  [STAND-OFF]  113.03,133.35 0 top
H99  STAND-OFF  [STAND-OFF]  133.35,113.03 0 top
H100  STAND-OFF  [STAND-OFF]  113.03,113.03 0 top
H101  STAND-OFF  [STAND-OFF]  29.72,159.26 0 top
H102  STAND-OFF  [STAND-OFF]  9.4,159.26 0 top
H103  STAND-OFF  [STAND-OFF]  29.72,138.94 0 top
H104  STAND-OFF  [STAND-OFF]  9.4,138.94 0 top
H105  STAND-OFF  [STAND-OFF]  55.63,159.26 0 top
H106  STAND-OFF  [STAND-OFF]  35.31,159.26 0 top
H107  STAND-OFF  [STAND-OFF]  55.63,138.94 0 top
H108  STAND-OFF  [STAND-OFF]  35.31,138.94 0 top
H109  STAND-OFF  [STAND-OFF]  81.53,159.26 0 top
H110  STAND-OFF  [STAND-OFF]  61.21,159.26 0 top
H111  STAND-OFF  [STAND-OFF]  81.53,138.94 0 top
H112  STAND-OFF  [STAND-OFF]  61.21,138.94 0 top
H113  STAND-OFF  [STAND-OFF]  107.44,159.26 0 top
H114  STAND-OFF  [STAND-OFF]  87.12,159.26 0 top
H115  STAND-OFF  [STAND-OFF]  107.44,138.94 0 top
H116  STAND-OFF  [STAND-OFF]  87.12,138.94 0 top
H117  STAND-OFF  [STAND-OFF]  133.35,159.26 0 top
H118  STAND-OFF  [STAND-OFF]  113.03,159.26 0 top
H119  STAND-OFF  [STAND-OFF]  133.35,138.94 0 top
H120  STAND-OFF  [STAND-OFF]  113.03,138.94 0 top
H121  STAND-OFF  [STAND-OFF]  29.72,185.17 0 top
H122  STAND-OFF  [STAND-OFF]  9.4,185.17 0 top
H123  STAND-OFF  [STAND-OFF]  29.72,164.85 0 top
H124  STAND-OFF  [STAND-OFF]  9.4,164.85 0 top
H125  STAND-OFF  [STAND-OFF]  55.63,185.17 0 top
H126  STAND-OFF  [STAND-OFF]  35.31,185.17 0 top
H127  STAND-OFF  [STAND-OFF]  55.63,164.85 0 top
H128  STAND-OFF  [STAND-OFF]  35.31,164.85 0 top
H129  STAND-OFF  [STAND-OFF]  81.53,185.17 0 top
H130  STAND-OFF  [STAND-OFF]  61.21,185.17 0 top
H131  STAND-OFF  [STAND-OFF]  81.53,164.85 0 top
H132  STAND-OFF  [STAND-OFF]  61.21,164.85 0 top
H133  STAND-OFF  [STAND-OFF]  107.44,185.17 0 top
H134  STAND-OFF  [STAND-OFF]  87.12,185.17 0 top
H135  STAND-OFF  [STAND-OFF]  107.44,164.85 0 top
H136  STAND-OFF  [STAND-OFF]  87.12,164.85 0 top
H137  STAND-OFF  [STAND-OFF]  133.35,185.17 0 top
H138  STAND-OFF  [STAND-OFF]  113.03,185.17 0 top
H139  STAND-OFF  [STAND-OFF]  133.35,164.85 0 top
H140  STAND-OFF  [STAND-OFF]  113.03,164.85 0 top
I2C  JUMPER-SMT_3_2-NC_TRACE_SILK  [SMT-JUMPER_3_2-NC_TRACE_SILK]  19.56,15.11 0 top
I2C1  JUMPER-SMT_3_2-NC_TRACE_SILK  [SMT-JUMPER_3_2-NC_TRACE_SILK]  45.47,15.11 0 top
I2C2  JUMPER-SMT_3_2-NC_TRACE_SILK  [SMT-JUMPER_3_2-NC_TRACE_SILK]  71.37,15.11 0 top
I2C3  JUMPER-SMT_3_2-NC_TRACE_SILK  [SMT-JUMPER_3_2-NC_TRACE_SILK]  97.28,15.11 0 top
I2C4  JUMPER-SMT_3_2-NC_TRACE_SILK  [SMT-JUMPER_3_2-NC_TRACE_SILK]  123.19,15.11 0 top
I2C5  JUMPER-SMT_3_2-NC_TRACE_SILK  [SMT-JUMPER_3_2-NC_TRACE_SILK]  19.56,41.02 0 top
I2C6  JUMPER-SMT_3_2-NC_TRACE_SILK  [SMT-JUMPER_3_2-NC_TRACE_SILK]  45.47,41.02 0 top
I2C7  JUMPER-SMT_3_2-NC_TRACE_SILK  [SMT-JUMPER_3_2-NC_TRACE_SILK]  71.37,41.02 0 top
I2C8  JUMPER-SMT_3_2-NC_TRACE_SILK  [SMT-JUMPER_3_2-NC_TRACE_SILK]  97.28,41.02 0 top
I2C9  JUMPER-SMT_3_2-NC_TRACE_SILK  [SMT-JUMPER_3_2-NC_TRACE_SILK]  123.19,41.02 0 top
I2C10  JUMPER-SMT_3_2-NC_TRACE_SILK  [SMT-JUMPER_3_2-NC_TRACE_SILK]  19.56,66.93 0 top
I2C11  JUMPER-SMT_3_2-NC_TRACE_SILK  [SMT-JUMPER_3_2-NC_TRACE_SILK]  45.47,66.93 0 top
I2C12  JUMPER-SMT_3_2-NC_TRACE_SILK  [SMT-JUMPER_3_2-NC_TRACE_SILK]  71.37,66.93 0 top
I2C13  JUMPER-SMT_3_2-NC_TRACE_SILK  [SMT-JUMPER_3_2-NC_TRACE_SILK]  97.28,66.93 0 top
I2C14  JUMPER-SMT_3_2-NC_TRACE_SILK  [SMT-JUMPER_3_2-NC_TRACE_SILK]  123.19,66.93 0 top
I2C15  JUMPER-SMT_3_2-NC_TRACE_SILK  [SMT-JUMPER_3_2-NC_TRACE_SILK]  19.56,92.84 0 top
I2C16  JUMPER-SMT_3_2-NC_TRACE_SILK  [SMT-JUMPER_3_2-NC_TRACE_SILK]  45.47,92.84 0 top
I2C17  JUMPER-SMT_3_2-NC_TRACE_SILK  [SMT-JUMPER_3_2-NC_TRACE_SILK]  71.37,92.84 0 top
I2C18  JUMPER-SMT_3_2-NC_TRACE_SILK  [SMT-JUMPER_3_2-NC_TRACE_SILK]  97.28,92.84 0 top
I2C19  JUMPER-SMT_3_2-NC_TRACE_SILK  [SMT-JUMPER_3_2-NC_TRACE_SILK]  123.19,92.84 0 top
I2C20  JUMPER-SMT_3_2-NC_TRACE_SILK  [SMT-JUMPER_3_2-NC_TRACE_SILK]  19.56,118.75 0 top
I2C21  JUMPER-SMT_3_2-NC_TRACE_SILK  [SMT-JUMPER_3_2-NC_TRACE_SILK]  45.47,118.75 0 top
I2C22  JUMPER-SMT_3_2-NC_TRACE_SILK  [SMT-JUMPER_3_2-NC_TRACE_SILK]  71.37,118.75 0 top
I2C23  JUMPER-SMT_3_2-NC_TRACE_SILK  [SMT-JUMPER_3_2-NC_TRACE_SILK]  97.28,118.75 0 top
I2C24  JUMPER-SMT_3_2-NC_TRACE_SILK  [SMT-JUMPER_3_2-NC_TRACE_SILK]  123.19,118.75 0 top
I2C25  JUMPER-SMT_3_2-NC_TRACE_SILK  [SMT-JUMPER_3_2-NC_TRACE_SILK]  19.56,144.65 0 top
I2C26  JUMPER-SMT_3_2-NC_TRACE_SILK  [SMT-JUMPER_3_2-NC_TRACE_SILK]  45.47,144.65 0 top
I2C27  JUMPER-SMT_3_2-NC_TRACE_SILK  [SMT-JUMPER_3_2-NC_TRACE_SILK]  71.37,144.65 0 top
I2C28  JUMPER-SMT_3_2-NC_TRACE_SILK  [SMT-JUMPER_3_2-NC_TRACE_SILK]  97.28,144.65 0 top
I2C29  JUMPER-SMT_3_2-NC_TRACE_SILK  [SMT-JUMPER_3_2-NC_TRACE_SILK]  123.19,144.65 0 top
I2C30  JUMPER-SMT_3_2-NC_TRACE_SILK  [SMT-JUMPER_3_2-NC_TRACE_SILK]  19.56,170.56 0 top
I2C31  JUMPER-SMT_3_2-NC_TRACE_SILK  [SMT-JUMPER_3_2-NC_TRACE_SILK]  45.47,170.56 0 top
I2C32  JUMPER-SMT_3_2-NC_TRACE_SILK  [SMT-JUMPER_3_2-NC_TRACE_SILK]  71.37,170.56 0 top
I2C33  JUMPER-SMT_3_2-NC_TRACE_SILK  [SMT-JUMPER_3_2-NC_TRACE_SILK]  97.28,170.56 0 top
I2C34  JUMPER-SMT_3_2-NC_TRACE_SILK  [SMT-JUMPER_3_2-NC_TRACE_SILK]  123.19,170.56 0 top
J1  [1X04_NO_SILK]  13.21,8.13 0 top
J2  QWIIC_RIGHT_ANGLE  [JST04_1MM_RA]  27.18,19.56 90 top
J3  [1X02_NO_SILK]  23.37,8.13 0 top
J4  QWIIC_RIGHT_ANGLE  [JST04_1MM_RA]  11.94,19.56 270 top
J5  [1X04_NO_SILK]  39.12,8.13 0 top
J6  QWIIC_RIGHT_ANGLE  [JST04_1MM_RA]  53.09,19.56 90 top
J7  QWIIC_RIGHT_ANGLE  [JST04_1MM_RA]  37.85,19.56 270 top
J8  [1X02_NO_SILK]  49.28,8.13 0 top
J9  [1X04_NO_SILK]  65.02,8.13 0 top
J10  QWIIC_RIGHT_ANGLE  [JST04_1MM_RA]  78.99,19.56 90 top
J11  QWIIC_RIGHT_ANGLE  [JST04_1MM_RA]  63.75,19.56 270 top
J12  [1X02_NO_SILK]  75.18,8.13 0 top
J13  [1X04_NO_SILK]  90.93,8.13 0 top
J14  QWIIC_RIGHT_ANGLE  [JST04_1MM_RA]  104.9,19.56 90 top
J15  QWIIC_RIGHT_ANGLE  [JST04_1MM_RA]  89.66,19.56 270 top
J16  [1X02_NO_SILK]  101.09,8.13 0 top
J17  [1X04_NO_SILK]  116.84,8.13 0 top
J18  QWIIC_RIGHT_ANGLE  [JST04_1MM_RA]  130.81,19.56 90 top
J19  QWIIC_RIGHT_ANGLE  [JST04_1MM_RA]  115.57,19.56 270 top
J20  [1X02_NO_SILK]  127,8.13 0 top
J21  [1X04_NO_SILK]  13.21,34.04 0 top
J22  QWIIC_RIGHT_ANGLE  [JST04_1MM_RA]  27.18,45.47 90 top
J23  QWIIC_RIGHT_ANGLE  [JST04_1MM_RA]  11.94,45.47 270 top
J24  [1X02_NO_SILK]  23.37,34.04 0 top
J25  [1X04_NO_SILK]  39.12,34.04 0 top
J26  QWIIC_RIGHT_ANGLE  [JST04_1MM_RA]  53.09,45.47 90 top
J27  QWIIC_RIGHT_ANGLE  [JST04_1MM_RA]  37.85,45.47 270 top
J28  [1X02_NO_SILK]  49.28,34.04 0 top
J29  [1X04_NO_SILK]  65.02,34.04 0 top
J30  QWIIC_RIGHT_ANGLE  [JST04_1MM_RA]  78.99,45.47 90 top
J31  QWIIC_RIGHT_ANGLE  [JST04_1MM_RA]  63.75,45.47 270 top
J32  [1X02_NO_SILK]  75.18,34.04 0 top
J33  [1X04_NO_SILK]  90.93,34.04 0 top
J34  QWIIC_RIGHT_ANGLE  [JST04_1MM_RA]  104.9,45.47 90 top
J35  QWIIC_RIGHT_ANGLE  [JST04_1MM_RA]  89.66,45.47 270 top
J36  [1X02_NO_SILK]  101.09,34.04 0 top
J37  [1X04_NO_SILK]  116.84,34.04 0 top
J38  QWIIC_RIGHT_ANGLE  [JST04_1MM_RA]  130.81,45.47 90 top
J39  QWIIC_RIGHT_ANGLE  [JST04_1MM_RA]  115.57,45.47 270 top
J40  [1X02_NO_SILK]  127,34.04 0 top
J41  [1X04_NO_SILK]  13.21,59.94 0 top
J42  QWIIC_RIGHT_ANGLE  [JST04_1MM_RA]  27.18,71.37 90 top
J43  QWIIC_RIGHT_ANGLE  [JST04_1MM_RA]  11.94,71.37 270 top
J44  [1X02_NO_SILK]  23.37,59.94 0 top
J45  [1X04_NO_SILK]  39.12,59.94 0 top
J46  QWIIC_RIGHT_ANGLE  [JST04_1MM_RA]  53.09,71.37 90 top
J47  QWIIC_RIGHT_ANGLE  [JST04_1MM_RA]  37.85,71.37 270 top
J48  [1X02_NO_SILK]  49.28,59.94 0 top
J49  [1X04_NO_SILK]  65.02,59.94 0 top
J50  QWIIC_RIGHT_ANGLE  [JST04_1MM_RA]  78.99,71.37 90 top
J51  QWIIC_RIGHT_ANGLE  [JST04_1MM_RA]  63.75,71.37 270 top
J52  [1X02_NO_SILK]  75.18,59.94 0 top
J53  [1X04_NO_SILK]  90.93,59.94 0 top
J54  QWIIC_RIGHT_ANGLE  [JST04_1MM_RA]  104.9,71.37 90 top
J55  QWIIC_RIGHT_ANGLE  [JST04_1MM_RA]  89.66,71.37 270 top
J56  [1X02_NO_SILK]  101.09,59.94 0 top
J57  [1X04_NO_SILK]  116.84,59.94 0 top
J58  QWIIC_RIGHT_ANGLE  [JST04_1MM_RA]  130.81,71.37 90 top
J59  QWIIC_RIGHT_ANGLE  [JST04_1MM_RA]  115.57,71.37 270 top
J60  [1X02_NO_SILK]  127,59.94 0 top
J61  [1X04_NO_SILK]  13.21,85.85 0 top
J62  QWIIC_RIGHT_ANGLE  [JST04_1MM_RA]  27.18,97.28 90 top
J63  QWIIC_RIGHT_ANGLE  [JST04_1MM_RA]  11.94,97.28 270 top
J64  [1X02_NO_SILK]  23.37,85.85 0 top
J65  [1X04_NO_SILK]  39.12,85.85 0 top
J66  QWIIC_RIGHT_ANGLE  [JST04_1MM_RA]  53.09,97.28 90 top
J67  QWIIC_RIGHT_ANGLE  [JST04_1MM_RA]  37.85,97.28 270 top
J68  [1X02_NO_SILK]  49.28,85.85 0 top
J69  [1X04_NO_SILK]  65.02,85.85 0 top
J70  QWIIC_RIGHT_ANGLE  [JST04_1MM_RA]  78.99,97.28 90 top
J71  QWIIC_RIGHT_ANGLE  [JST04_1MM_RA]  63.75,97.28 270 top
J72  [1X02_NO_SILK]  75.18,85.85 0 top
J73  [1X04_NO_SILK]  90.93,85.85 0 top
J74  QWIIC_RIGHT_ANGLE  [JST04_1MM_RA]  104.9,97.28 90 top
J75  QWIIC_RIGHT_ANGLE  [JST04_1MM_RA]  89.66,97.28 270 top
J76  [1X02_NO_SILK]  101.09,85.85 0 top
J77  [1X04_NO_SILK]  116.84,85.85 0 top
J78  QWIIC_RIGHT_ANGLE  [JST04_1MM_RA]  130.81,97.28 90 top
J79  QWIIC_RIGHT_ANGLE  [JST04_1MM_RA]  115.57,97.28 270 top
J80  [1X02_NO_SILK]  127,85.85 0 top
J81  [1X04_NO_SILK]  13.21,111.76 0 top
J82  QWIIC_RIGHT_ANGLE  [JST04_1MM_RA]  27.18,123.19 90 top
J83  QWIIC_RIGHT_ANGLE  [JST04_1MM_RA]  11.94,123.19 270 top
J84  [1X02_NO_SILK]  23.37,111.76 0 top
J85  [1X04_NO_SILK]  39.12,111.76 0 top
J86  QWIIC_RIGHT_ANGLE  [JST04_1MM_RA]  53.09,123.19 90 top
J87  QWIIC_RIGHT_ANGLE  [JST04_1MM_RA]  37.85,123.19 270 top
J88  [1X02_NO_SILK]  49.28,111.76 0 top
J89  [1X04_NO_SILK]  65.02,111.76 0 top
J90  QWIIC_RIGHT_ANGLE  [JST04_1MM_RA]  78.99,123.19 90 top
J91  QWIIC_RIGHT_ANGLE  [JST04_1MM_RA]  63.75,123.19 270 top
J92  [1X02_NO_SILK]  75.18,111.76 0 top
J93  [1X04_NO_SILK]  90.93,111.76 0 top
J94  QWIIC_RIGHT_ANGLE  [JST04_1MM_RA]  104.9,123.19 90 top
J95  QWIIC_RIGHT_ANGLE  [JST04_1MM_RA]  89.66,123.19 270 top
J96  [1X02_NO_SILK]  101.09,111.76 0 top
J97  [1X04_NO_SILK]  116.84,111.76 0 top
J98  QWIIC_RIGHT_ANGLE  [JST04_1MM_RA]  130.81,123.19 90 top
J99  QWIIC_RIGHT_ANGLE  [JST04_1MM_RA]  115.57,123.19 270 top
J100  [1X02_NO_SILK]  127,111.76 0 top
J101  [1X04_NO_SILK]  13.21,137.67 0 top
J102  QWIIC_RIGHT_ANGLE  [JST04_1MM_RA]  27.18,149.1 90 top
J103  QWIIC_RIGHT_ANGLE  [JST04_1MM_RA]  11.94,149.1 270 top
J104  [1X02_NO_SILK]  23.37,137.67 0 top
J105  [1X04_NO_SILK]  39.12,137.67 0 top
J106  QWIIC_RIGHT_ANGLE  [JST04_1MM_RA]  53.09,149.1 90 top
J107  QWIIC_RIGHT_ANGLE  [JST04_1MM_RA]  37.85,149.1 270 top
J108  [1X02_NO_SILK]  49.28,137.67 0 top
J109  [1X04_NO_SILK]  65.02,137.67 0 top
J110  QWIIC_RIGHT_ANGLE  [JST04_1MM_RA]  78.99,149.1 90 top
J111  QWIIC_RIGHT_ANGLE  [JST04_1MM_RA]  63.75,149.1 270 top
J112  [1X02_NO_SILK]  75.18,137.67 0 top
J113  [1X04_NO_SILK]  90.93,137.67 0 top
J114  QWIIC_RIGHT_ANGLE  [JST04_1MM_RA]  104.9,149.1 90 top
J115  QWIIC_RIGHT_ANGLE  [JST04_1MM_RA]  89.66,149.1 270 top
J116  [1X02_NO_SILK]  101.09,137.67 0 top
J117  [1X04_NO_SILK]  116.84,137.67 0 top
J118  QWIIC_RIGHT_ANGLE  [JST04_1MM_RA]  130.81,149.1 90 top
J119  QWIIC_RIGHT_ANGLE  [JST04_1MM_RA]  115.57,149.1 270 top
J120  [1X02_NO_SILK]  127,137.67 0 top
J121  [1X04_NO_SILK]  13.21,163.58 0 top
J122  QWIIC_RIGHT_ANGLE  [JST04_1MM_RA]  27.18,175.01 90 top
J123  QWIIC_RIGHT_ANGLE  [JST04_1MM_RA]  11.94,175.01 270 top
J124  [1X02_NO_SILK]  23.37,163.58 0 top
J125  [1X04_NO_SILK]  39.12,163.58 0 top
J126  QWIIC_RIGHT_ANGLE  [JST04_1MM_RA]  53.09,175.01 90 top
J127  QWIIC_RIGHT_ANGLE  [JST04_1MM_RA]  37.85,175.01 270 top
J128  [1X02_NO_SILK]  49.28,163.58 0 top
J129  [1X04_NO_SILK]  65.02,163.58 0 top
J130  QWIIC_RIGHT_ANGLE  [JST04_1MM_RA]  78.99,175.01 90 top
J131  QWIIC_RIGHT_ANGLE  [JST04_1MM_RA]  63.75,175.01 270 top
J132  [1X02_NO_SILK]  75.18,163.58 0 top
J133  [1X04_NO_SILK]  90.93,163.58 0 top
J134  QWIIC_RIGHT_ANGLE  [JST04_1MM_RA]  104.9,175.01 90 top
J135  QWIIC_RIGHT_ANGLE  [JST04_1MM_RA]  89.66,175.01 270 top
J136  [1X02_NO_SILK]  101.09,163.58 0 top
J137  [1X04_NO_SILK]  116.84,163.58 0 top
J138  QWIIC_RIGHT_ANGLE  [JST04_1MM_RA]  130.81,175.01 90 top
J139  QWIIC_RIGHT_ANGLE  [JST04_1MM_RA]  115.57,175.01 270 top
J140  [1X02_NO_SILK]  127,163.58 0 top
LOGO1  OSHW-LOGOS  [OSHW-LOGO-S]  29.72,13.21 0 bottom
LOGO2  QWIIC_LOGO_5MM  [QWIIC_5MM]  29.08,24 0 top
LOGO3  OSHW-LOGOS  [OSHW-LOGO-S]  55.63,13.21 0 bottom
LOGO4  QWIIC_LOGO_5MM  [QWIIC_5MM]  54.99,24 0 top
LOGO5  OSHW-LOGOS  [OSHW-LOGO-S]  81.53,13.21 0 bottom
LOGO6  QWIIC_LOGO_5MM  [QWIIC_5MM]  80.9,24 0 top
LOGO7  OSHW-LOGOS  [OSHW-LOGO-S]  107.44,13.21 0 bottom
LOGO8  QWIIC_LOGO_5MM  [QWIIC_5MM]  106.81,24 0 top
LOGO9  OSHW-LOGOS  [OSHW-LOGO-S]  133.35,13.21 0 bottom
LOGO10  QWIIC_LOGO_5MM  [QWIIC_5MM]  132.72,24 0 top
LOGO11  OSHW-LOGOS  [OSHW-LOGO-S]  29.72,39.12 0 bottom
LOGO12  QWIIC_LOGO_5MM  [QWIIC_5MM]  29.08,49.91 0 top
LOGO13  OSHW-LOGOS  [OSHW-LOGO-S]  55.63,39.12 0 bottom
LOGO14  QWIIC_LOGO_5MM  [QWIIC_5MM]  54.99,49.91 0 top
LOGO15  OSHW-LOGOS  [OSHW-LOGO-S]  81.53,39.12 0 bottom
LOGO16  QWIIC_LOGO_5MM  [QWIIC_5MM]  80.9,49.91 0 top
LOGO17  OSHW-LOGOS  [OSHW-LOGO-S]  107.44,39.12 0 bottom
LOGO18  QWIIC_LOGO_5MM  [QWIIC_5MM]  106.81,49.91 0 top
LOGO19  OSHW-LOGOS  [OSHW-LOGO-S]  133.35,39.12 0 bottom
LOGO20  QWIIC_LOGO_5MM  [QWIIC_5MM]  132.72,49.91 0 top
LOGO21  OSHW-LOGOS  [OSHW-LOGO-S]  29.72,65.02 0 bottom
LOGO22  QWIIC_LOGO_5MM  [QWIIC_5MM]  29.08,75.82 0 top
LOGO23  OSHW-LOGOS  [OSHW-LOGO-S]  55.63,65.02 0 bottom
LOGO24  QWIIC_LOGO_5MM  [QWIIC_5MM]  54.99,75.82 0 top
LOGO25  OSHW-LOGOS  [OSHW-LOGO-S]  81.53,65.02 0 bottom
LOGO26  QWIIC_LOGO_5MM  [QWIIC_5MM]  80.9,75.82 0 top
LOGO27  OSHW-LOGOS  [OSHW-LOGO-S]  107.44,65.02 0 bottom
LOGO28  QWIIC_LOGO_5MM  [QWIIC_5MM]  106.81,75.82 0 top
LOGO29  OSHW-LOGOS  [OSHW-LOGO-S]  133.35,65.02 0 bottom
LOGO30  QWIIC_LOGO_5MM  [QWIIC_5MM]  132.72,75.82 0 top
LOGO31  OSHW-LOGOS  [OSHW-LOGO-S]  29.72,90.93 0 bottom
LOGO32  QWIIC_LOGO_5MM  [QWIIC_5MM]  29.08,101.73 0 top
LOGO33  OSHW-LOGOS  [OSHW-LOGO-S]  55.63,90.93 0 bottom
LOGO34  QWIIC_LOGO_5MM  [QWIIC_5MM]  54.99,101.73 0 top
LOGO35  OSHW-LOGOS  [OSHW-LOGO-S]  81.53,90.93 0 bottom
LOGO36  QWIIC_LOGO_5MM  [QWIIC_5MM]  80.9,101.73 0 top
LOGO37  OSHW-LOGOS  [OSHW-LOGO-S]  107.44,90.93 0 bottom
LOGO38  QWIIC_LOGO_5MM  [QWIIC_5MM]  106.81,101.73 0 top
LOGO39  OSHW-LOGOS  [OSHW-LOGO-S]  133.35,90.93 0 bottom
LOGO40  QWIIC_LOGO_5MM  [QWIIC_5MM]  132.72,101.73 0 top
LOGO41  OSHW-LOGOS  [OSHW-LOGO-S]  29.72,116.84 0 bottom
LOGO42  QWIIC_LOGO_5MM  [QWIIC_5MM]  29.08,127.64 0 top
LOGO43  OSHW-LOGOS  [OSHW-LOGO-S]  55.63,116.84 0 bottom
LOGO44  QWIIC_LOGO_5MM  [QWIIC_5MM]  54.99,127.64 0 top
LOGO45  OSHW-LOGOS  [OSHW-LOGO-S]  81.53,116.84 0 bottom
LOGO46  QWIIC_LOGO_5MM  [QWIIC_5MM]  80.9,127.64 0 top
LOGO47  OSHW-LOGOS  [OSHW-LOGO-S]  107.44,116.84 0 bottom
LOGO48  QWIIC_LOGO_5MM  [QWIIC_5MM]  106.81,127.64 0 top
LOGO49  OSHW-LOGOS  [OSHW-LOGO-S]  133.35,116.84 0 bottom
LOGO50  QWIIC_LOGO_5MM  [QWIIC_5MM]  132.72,127.64 0 top
LOGO51  OSHW-LOGOS  [OSHW-LOGO-S]  29.72,142.75 0 bottom
LOGO52  QWIIC_LOGO_5MM  [QWIIC_5MM]  29.08,153.54 0 top
LOGO53  OSHW-LOGOS  [OSHW-LOGO-S]  55.63,142.75 0 bottom
LOGO54  QWIIC_LOGO_5MM  [QWIIC_5MM]  54.99,153.54 0 top
LOGO55  OSHW-LOGOS  [OSHW-LOGO-S]  81.53,142.75 0 bottom
LOGO56  QWIIC_LOGO_5MM  [QWIIC_5MM]  80.9,153.54 0 top
LOGO57  OSHW-LOGOS  [OSHW-LOGO-S]  107.44,142.75 0 bottom
LOGO58  QWIIC_LOGO_5MM  [QWIIC_5MM]  106.81,153.54 0 top
LOGO59  OSHW-LOGOS  [OSHW-LOGO-S]  133.35,142.75 0 bottom
LOGO60  QWIIC_LOGO_5MM  [QWIIC_5MM]  132.72,153.54 0 top
LOGO61  OSHW-LOGOS  [OSHW-LOGO-S]  29.72,168.66 0 bottom
LOGO62  QWIIC_LOGO_5MM  [QWIIC_5MM]  29.08,179.45 0 top
LOGO63  OSHW-LOGOS  [OSHW-LOGO-S]  55.63,168.66 0 bottom
LOGO64  QWIIC_LOGO_5MM  [QWIIC_5MM]  54.99,179.45 0 top
LOGO65  OSHW-LOGOS  [OSHW-LOGO-S]  81.53,168.66 0 bottom
LOGO66  QWIIC_LOGO_5MM  [QWIIC_5MM]  80.9,179.45 0 top
LOGO67  OSHW-LOGOS  [OSHW-LOGO-S]  107.44,168.66 0 bottom
LOGO68  QWIIC_LOGO_5MM  [QWIIC_5MM]  106.81,179.45 0 top
LOGO69  OSHW-LOGOS  [OSHW-LOGO-S]  133.35,168.66 0 bottom
LOGO70  QWIIC_LOGO_5MM  [QWIIC_5MM]  132.72,179.45 0 top
PWRLED  JUMPER-SMT_2_NC_TRACE_SILK  [SMT-JUMPER_2_NC_TRACE_SILK]  13.21,14.22 90 top
PWRLED1  JUMPER-SMT_2_NC_TRACE_SILK  [SMT-JUMPER_2_NC_TRACE_SILK]  39.12,14.22 90 top
PWRLED2  JUMPER-SMT_2_NC_TRACE_SILK  [SMT-JUMPER_2_NC_TRACE_SILK]  65.02,14.22 90 top
PWRLED3  JUMPER-SMT_2_NC_TRACE_SILK  [SMT-JUMPER_2_NC_TRACE_SILK]  90.93,14.22 90 top
PWRLED4  JUMPER-SMT_2_NC_TRACE_SILK  [SMT-JUMPER_2_NC_TRACE_SILK]  116.84,14.22 90 top
PWRLED5  JUMPER-SMT_2_NC_TRACE_SILK  [SMT-JUMPER_2_NC_TRACE_SILK]  13.21,40.13 90 top
PWRLED6  JUMPER-SMT_2_NC_TRACE_SILK  [SMT-JUMPER_2_NC_TRACE_SILK]  39.12,40.13 90 top
PWRLED7  JUMPER-SMT_2_NC_TRACE_SILK  [SMT-JUMPER_2_NC_TRACE_SILK]  65.02,40.13 90 top
PWRLED8  JUMPER-SMT_2_NC_TRACE_SILK  [SMT-JUMPER_2_NC_TRACE_SILK]  90.93,40.13 90 top
PWRLED9  JUMPER-SMT_2_NC_TRACE_SILK  [SMT-JUMPER_2_NC_TRACE_SILK]  116.84,40.13 90 top
PWRLED10  JUMPER-SMT_2_NC_TRACE_SILK  [SMT-JUMPER_2_NC_TRACE_SILK]  13.21,66.04 90 top
PWRLED11  JUMPER-SMT_2_NC_TRACE_SILK  [SMT-JUMPER_2_NC_TRACE_SILK]  39.12,66.04 90 top
PWRLED12  JUMPER-SMT_2_NC_TRACE_SILK  [SMT-JUMPER_2_NC_TRACE_SILK]  65.02,66.04 90 top
PWRLED13  JUMPER-SMT_2_NC_TRACE_SILK  [SMT-JUMPER_2_NC_TRACE_SILK]  90.93,66.04 90 top
PWRLED14  JUMPER-SMT_2_NC_TRACE_SILK  [SMT-JUMPER_2_NC_TRACE_SILK]  116.84,66.04 90 top
PWRLED15  JUMPER-SMT_2_NC_TRACE_SILK  [SMT-JUMPER_2_NC_TRACE_SILK]  13.21,91.95 90 top
PWRLED16  JUMPER-SMT_2_NC_TRACE_SILK  [SMT-JUMPER_2_NC_TRACE_SILK]  39.12,91.95 90 top
PWRLED17  JUMPER-SMT_2_NC_TRACE_SILK  [SMT-JUMPER_2_NC_TRACE_SILK]  65.02,91.95 90 top
PWRLED18  JUMPER-SMT_2_NC_TRACE_SILK  [SMT-JUMPER_2_NC_TRACE_SILK]  90.93,91.95 90 top
PWRLED19  JUMPER-SMT_2_NC_TRACE_SILK  [SMT-JUMPER_2_NC_TRACE_SILK]  116.84,91.95 90 top
PWRLED20  JUMPER-SMT_2_NC_TRACE_SILK  [SMT-JUMPER_2_NC_TRACE_SILK]  13.21,117.86 90 top
PWRLED21  JUMPER-SMT_2_NC_TRACE_SILK  [SMT-JUMPER_2_NC_TRACE_SILK]  39.12,117.86 90 top
PWRLED22  JUMPER-SMT_2_NC_TRACE_SILK  [SMT-JUMPER_2_NC_TRACE_SILK]  65.02,117.86 90 top
PWRLED23  JUMPER-SMT_2_NC_TRACE_SILK  [SMT-JUMPER_2_NC_TRACE_SILK]  90.93,117.86 90 top
PWRLED24  JUMPER-SMT_2_NC_TRACE_SILK  [SMT-JUMPER_2_NC_TRACE_SILK]  116.84,117.86 90 top
PWRLED25  JUMPER-SMT_2_NC_TRACE_SILK  [SMT-JUMPER_2_NC_TRACE_SILK]  13.21,143.76 90 top
PWRLED26  JUMPER-SMT_2_NC_TRACE_SILK  [SMT-JUMPER_2_NC_TRACE_SILK]  39.12,143.76 90 top
PWRLED27  JUMPER-SMT_2_NC_TRACE_SILK  [SMT-JUMPER_2_NC_TRACE_SILK]  65.02,143.76 90 top
PWRLED28  JUMPER-SMT_2_NC_TRACE_SILK  [SMT-JUMPER_2_NC_TRACE_SILK]  90.93,143.76 90 top
PWRLED29  JUMPER-SMT_2_NC_TRACE_SILK  [SMT-JUMPER_2_NC_TRACE_SILK]  116.84,143.76 90 top
PWRLED30  JUMPER-SMT_2_NC_TRACE_SILK  [SMT-JUMPER_2_NC_TRACE_SILK]  13.21,169.67 90 top
PWRLED31  JUMPER-SMT_2_NC_TRACE_SILK  [SMT-JUMPER_2_NC_TRACE_SILK]  39.12,169.67 90 top
PWRLED32  JUMPER-SMT_2_NC_TRACE_SILK  [SMT-JUMPER_2_NC_TRACE_SILK]  65.02,169.67 90 top
PWRLED33  JUMPER-SMT_2_NC_TRACE_SILK  [SMT-JUMPER_2_NC_TRACE_SILK]  90.93,169.67 90 top
PWRLED34  JUMPER-SMT_2_NC_TRACE_SILK  [SMT-JUMPER_2_NC_TRACE_SILK]  116.84,169.67 90 top
R1  4.7k  [0603]  22.1,15.11 270 top
R2  4.7k  [0603]  17.02,15.11 270 top
R3  4.7k  [0603]  15.75,19.56 90 top
R4  1k  [0603]  8.76,13.21 0 top
R5  4.7k  [0603]  48.01,15.11 270 top
R6  4.7k  [0603]  42.93,15.11 270 top
R7  4.7k  [0603]  41.66,19.56 90 top
R8  1k  [0603]  34.67,13.21 0 top
R9  4.7k  [0603]  73.91,15.11 270 top
R10  4.7k  [0603]  68.83,15.11 270 top
R11  4.7k  [0603]  67.56,19.56 90 top
R12  1k  [0603]  60.58,13.21 0 top
R13  4.7k  [0603]  99.82,15.11 270 top
R14  4.7k  [0603]  94.74,15.11 270 top
R15  4.7k  [0603]  93.47,19.56 90 top
R16  1k  [0603]  86.49,13.21 0 top
R17  4.7k  [0603]  125.73,15.11 270 top
R18  4.7k  [0603]  120.65,15.11 270 top
R19  4.7k  [0603]  119.38,19.56 90 top
R20  1k  [0603]  112.4,13.21 0 top
R21  4.7k  [0603]  22.1,41.02 270 top
R22  4.7k  [0603]  17.02,41.02 270 top
R23  4.7k  [0603]  15.75,45.47 90 top
R24  1k  [0603]  8.76,39.12 0 top
R25  4.7k  [0603]  48.01,41.02 270 top
R26  4.7k  [0603]  42.93,41.02 270 top
R27  4.7k  [0603]  41.66,45.47 90 top
R28  1k  [0603]  34.67,39.12 0 top
R29  4.7k  [0603]  73.91,41.02 270 top
R30  4.7k  [0603]  68.83,41.02 270 top
R31  4.7k  [0603]  67.56,45.47 90 top
R32  1k  [0603]  60.58,39.12 0 top
R33  4.7k  [0603]  99.82,41.02 270 top
R34  4.7k  [0603]  94.74,41.02 270 top
R35  4.7k  [0603]  93.47,45.47 90 top
R36  1k  [0603]  86.49,39.12 0 top
R37  4.7k  [0603]  125.73,41.02 270 top
R38  4.7k  [0603]  120.65,41.02 270 top
R39  4.7k  [0603]  119.38,45.47 90 top
R40  1k  [0603]  112.4,39.12 0 top
R41  4.7k  [0603]  22.1,66.93 270 top
R42  4.7k  [0603]  17.02,66.93 270 top
R43  4.7k  [0603]  15.75,71.37 90 top
R44  1k  [0603]  8.76,65.02 0 top
R45  4.7k  [0603]  48.01,66.93 270 top
R46  4.7k  [0603]  42.93,66.93 270 top
R47  4.7k  [0603]  41.66,71.37 90 top
R48  1k  [0603]  34.67,65.02 0 top
R49  4.7k  [0603]  73.91,66.93 270 top
R50  4.7k  [0603]  68.83,66.93 270 top
R51  4.7k  [0603]  67.56,71.37 90 top
R52  1k  [0603]  60.58,65.02 0 top
R53  4.7k  [0603]  99.82,66.93 270 top
R54  4.7k  [0603]  94.74,66.93 270 top
R55  4.7k  [0603]  93.47,71.37 90 top
R56  1k  [0603]  86.49,65.02 0 top
R57  4.7k  [0603]  125.73,66.93 270 top
R58  4.7k  [0603]  120.65,66.93 270 top
R59  4.7k  [0603]  119.38,71.37 90 top
R60  1k  [0603]  112.4,65.02 0 top
R61  4.7k  [0603]  22.1,92.84 270 top
R62  4.7k  [0603]  17.02,92.84 270 top
R63  4.7k  [0603]  15.75,97.28 90 top
R64  1k  [0603]  8.76,90.93 0 top
R65  4.7k  [0603]  48.01,92.84 270 top
R66  4.7k  [0603]  42.93,92.84 270 top
R67  4.7k  [0603]  41.66,97.28 90 top
R68  1k  [0603]  34.67,90.93 0 top
R69  4.7k  [0603]  73.91,92.84 270 top
R70  4.7k  [0603]  68.83,92.84 270 top
R71  4.7k  [0603]  67.56,97.28 90 top
R72  1k  [0603]  60.58,90.93 0 top
R73  4.7k  [0603]  99.82,92.84 270 top
R74  4.7k  [0603]  94.74,92.84 270 top
R75  4.7k  [0603]  93.47,97.28 90 top
R76  1k  [0603]  86.49,90.93 0 top
R77  4.7k  [0603]  125.73,92.84 270 top
R78  4.7k  [0603]  120.65,92.84 270 top
R79  4.7k  [0603]  119.38,97.28 90 top
R80  1k  [0603]  112.4,90.93 0 top
R81  4.7k  [0603]  22.1,118.75 270 top
R82  4.7k  [0603]  17.02,118.75 270 top
R83  4.7k  [0603]  15.75,123.19 90 top
R84  1k  [0603]  8.76,116.84 0 top
R85  4.7k  [0603]  48.01,118.75 270 top
R86  4.7k  [0603]  42.93,118.75 270 top
R87  4.7k  [0603]  41.66,123.19 90 top
R88  1k  [0603]  34.67,116.84 0 top
R89  4.7k  [0603]  73.91,118.75 270 top
R90  4.7k  [0603]  68.83,118.75 270 top
R91  4.7k  [0603]  67.56,123.19 90 top
R92  1k  [0603]  60.58,116.84 0 top
R93  4.7k  [0603]  99.82,118.75 270 top
R94  4.7k  [0603]  94.74,118.75 270 top
R95  4.7k  [0603]  93.47,123.19 90 top
R96  1k  [0603]  86.49,116.84 0 top
R97  4.7k  [0603]  125.73,118.75 270 top
R98  4.7k  [0603]  120.65,118.75 270 top
R99  4.7k  [0603]  119.38,123.19 90 top
R100  1k  [0603]  112.4,116.84 0 top
R101  4.7k  [0603]  22.1,144.65 270 top
R102  4.7k  [0603]  17.02,144.65 270 top
R103  4.7k  [0603]  15.75,149.1 90 top
R104  1k  [0603]  8.76,142.75 0 top
R105  4.7k  [0603]  48.01,144.65 270 top
R106  4.7k  [0603]  42.93,144.65 270 top
R107  4.7k  [0603]  41.66,149.1 90 top
R108  1k  [0603]  34.67,142.75 0 top
R109  4.7k  [0603]  73.91,144.65 270 top
R110  4.7k  [0603]  68.83,144.65 270 top
R111  4.7k  [0603]  67.56,149.1 90 top
R112  1k  [0603]  60.58,142.75 0 top
R113  4.7k  [0603]  99.82,144.65 270 top
R114  4.7k  [0603]  94.74,144.65 270 top
R115  4.7k  [0603]  93.47,149.1 90 top
R116  1k  [0603]  86.49,142.75 0 top
R117  4.7k  [0603]  125.73,144.65 270 top
R118  4.7k  [0603]  120.65,144.65 270 top
R119  4.7k  [0603]  119.38,149.1 90 top
R120  1k  [0603]  112.4,142.75 0 top
R121  4.7k  [0603]  22.1,170.56 270 top
R122  4.7k  [0603]  17.02,170.56 270 top
R123  4.7k  [0603]  15.75,175.01 90 top
R124  1k  [0603]  8.76,168.66 0 top
R125  4.7k  [0603]  48.01,170.56 270 top
R126  4.7k  [0603]  42.93,170.56 270 top
R127  4.7k  [0603]  41.66,175.01 90 top
R128  1k  [0603]  34.67,168.66 0 top
R129  4.7k  [0603]  73.91,170.56 270 top
R130  4.7k  [0603]  68.83,170.56 270 top
R131  4.7k  [0603]  67.56,175.01 90 top
R132  1k  [0603]  60.58,168.66 0 top
R133  4.7k  [0603]  99.82,170.56 270 top
R134  4.7k  [0603]  94.74,170.56 270 top
R135  4.7k  [0603]  93.47,175.01 90 top
R136  1k  [0603]  86.49,168.66 0 top
R137  4.7k  [0603]  125.73,170.56 270 top
R138  4.7k  [0603]  120.65,170.56 270 top
R139  4.7k  [0603]  119.38,175.01 90 top
R140  1k  [0603]  112.4,168.66 0 top
U1  ZMOD4450 Refrigeration Gas Sensor  [LGA-12-3X3]  19.56,19.56 0 top
U2  ZMOD4450 Refrigeration Gas Sensor  [LGA-12-3X3]  45.47,19.56 0 top
U3  ZMOD4450 Refrigeration Gas Sensor  [LGA-12-3X3]  71.37,19.56 0 top
U4  ZMOD4450 Refrigeration Gas Sensor  [LGA-12-3X3]  97.28,19.56 0 top
U5  ZMOD4450 Refrigeration Gas Sensor  [LGA-12-3X3]  123.19,19.56 0 top
U6  ZMOD4450 Refrigeration Gas Sensor  [LGA-12-3X3]  19.56,45.47 0 top
U7  ZMOD4450 Refrigeration Gas Sensor  [LGA-12-3X3]  45.47,45.47 0 top
U8  ZMOD4450 Refrigeration Gas Sensor  [LGA-12-3X3]  71.37,45.47 0 top
U9  ZMOD4450 Refrigeration Gas Sensor  [LGA-12-3X3]  97.28,45.47 0 top
U10  ZMOD4450 Refrigeration Gas Sensor  [LGA-12-3X3]  123.19,45.47 0 top
U11  ZMOD4450 Refrigeration Gas Sensor  [LGA-12-3X3]  19.56,71.37 0 top
U12  ZMOD4450 Refrigeration Gas Sensor  [LGA-12-3X3]  45.47,71.37 0 top
U13  ZMOD4450 Refrigeration Gas Sensor  [LGA-12-3X3]  71.37,71.37 0 top
U14  ZMOD4450 Refrigeration Gas Sensor  [LGA-12-3X3]  97.28,71.37 0 top
U15  ZMOD4450 Refrigeration Gas Sensor  [LGA-12-3X3]  123.19,71.37 0 top
U16  ZMOD4450 Refrigeration Gas Sensor  [LGA-12-3X3]  19.56,97.28 0 top
U17  ZMOD4450 Refrigeration Gas Sensor  [LGA-12-3X3]  45.47,97.28 0 top
U18  ZMOD4450 Refrigeration Gas Sensor  [LGA-12-3X3]  71.37,97.28 0 top
U19  ZMOD4450 Refrigeration Gas Sensor  [LGA-12-3X3]  97.28,97.28 0 top
U20  ZMOD4450 Refrigeration Gas Sensor  [LGA-12-3X3]  123.19,97.28 0 top
U21  ZMOD4450 Refrigeration Gas Sensor  [LGA-12-3X3]  19.56,123.19 0 top
U22  ZMOD4450 Refrigeration Gas Sensor  [LGA-12-3X3]  45.47,123.19 0 top
U23  ZMOD4450 Refrigeration Gas Sensor  [LGA-12-3X3]  71.37,123.19 0 top
U24  ZMOD4450 Refrigeration Gas Sensor  [LGA-12-3X3]  97.28,123.19 0 top
U25  ZMOD4450 Refrigeration Gas Sensor  [LGA-12-3X3]  123.19,123.19 0 top
U26  ZMOD4450 Refrigeration Gas Sensor  [LGA-12-3X3]  19.56,149.1 0 top
U27  ZMOD4450 Refrigeration Gas Sensor  [LGA-12-3X3]  45.47,149.1 0 top
U28  ZMOD4450 Refrigeration Gas Sensor  [LGA-12-3X3]  71.37,149.1 0 top
U29  ZMOD4450 Refrigeration Gas Sensor  [LGA-12-3X3]  97.28,149.1 0 top
U30  ZMOD4450 Refrigeration Gas Sensor  [LGA-12-3X3]  123.19,149.1 0 top
U31  ZMOD4450 Refrigeration Gas Sensor  [LGA-12-3X3]  19.56,175.01 0 top
U32  ZMOD4450 Refrigeration Gas Sensor  [LGA-12-3X3]  45.47,175.01 0 top
U33  ZMOD4450 Refrigeration Gas Sensor  [LGA-12-3X3]  71.37,175.01 0 top
U34  ZMOD4450 Refrigeration Gas Sensor  [LGA-12-3X3]  97.28,175.01 0 top
U35  ZMOD4450 Refrigeration Gas Sensor  [LGA-12-3X3]  123.19,175.01 0 top
U$1  [GND_P]  13.21,8.38 90 top
U$2  [GND_P]  13.21,8.38 90 bottom
U$3  [ZMOD44501]  14.86,24.38 0 top
U$4  [INT_O]  23.37,8.38 90 top
U$5  [3V3_P]  15.75,8.38 90 top
U$6  [3V3_P]  15.75,8.38 90 bottom
U$7  [SDA_IO]  18.29,8.51 90 top
U$8  [SDA_IO]  18.29,8.51 90 bottom
U$9  [SCL_IO]  20.83,8.51 90 top
U$10  [SCL_IO]  20.83,8.51 90 bottom
U$11  [I2C]  17.65,16.89 0 top
U$12  [PWR_TO]  11.3,11.75 90 top
U$13  [!RST_I]  25.91,8.38 90 top
U$14  [INT_O]  23.37,8.38 90 bottom
U$15  [REFRIGERATION_GAS_SENSOR0]  29.34,26.04 0 bottom
U$16  [!RST_I]  25.91,8.38 90 bottom
U$17  [REFRIGERATION_GAS_SENSOR0]  10.03,26.04 0 top
U$18  [SPARKX-MEDIUM]  19.56,28.45 0 top
U$19  [SPARKX-MEDIUM]  19.56,28.45 0 bottom
U$20  [ZMOD44501]  24.26,24.38 0 bottom
U$21  [ADDR#_0X320]  24.51,22.73 0 bottom
U$22  [PRODUCTION_INSTRUCTIONS]  -28.7,-3.3 0 top  (outside the outline)
U$23  [GND_P]  39.12,8.38 90 top
U$24  [GND_P]  39.12,8.38 90 bottom
U$25  [3V3_P]  41.66,8.38 90 top
U$26  [3V3_P]  41.66,8.38 90 bottom
U$27  [SDA_IO]  44.2,8.51 90 top
U$28  [SDA_IO]  44.2,8.51 90 bottom
U$29  [SCL_IO]  46.74,8.51 90 top
U$30  [SCL_IO]  46.74,8.51 90 bottom
U$31  [I2C]  43.56,16.89 0 top
U$32  [PWR_TO]  37.21,11.75 90 top
U$33  [!RST_I]  51.82,8.38 90 top
U$34  [!RST_I]  51.82,8.38 90 bottom
U$35  [SPARKX-MEDIUM]  45.47,28.45 0 top
U$36  [SPARKX-MEDIUM]  45.47,28.45 0 bottom
U$37  [REFRIGERATION_GAS_SENSOR0]  35.94,26.04 0 top
U$38  [ZMOD44501]  40.77,24.38 0 top
U$39  [INT_O]  49.28,8.38 90 top
U$40  [INT_O]  49.28,8.38 90 bottom
U$41  [REFRIGERATION_GAS_SENSOR0]  55.24,26.04 0 bottom
U$42  [ZMOD44501]  50.16,24.38 0 bottom
U$43  [ADDR#_0X320]  50.42,22.73 0 bottom
U$44  [PRODUCTION_INSTRUCTIONS]  -2.79,-3.3 0 top  (outside the outline)
U$45  [GND_P]  65.02,8.38 90 top
U$46  [GND_P]  65.02,8.38 90 bottom
U$47  [3V3_P]  67.56,8.38 90 top
U$48  [3V3_P]  67.56,8.38 90 bottom
U$49  [SDA_IO]  70.1,8.51 90 top
U$50  [SDA_IO]  70.1,8.51 90 bottom
U$51  [SCL_IO]  72.64,8.51 90 top
U$52  [SCL_IO]  72.64,8.51 90 bottom
U$53  [I2C]  69.47,16.89 0 top
U$54  [PWR_TO]  63.12,11.75 90 top
U$55  [!RST_I]  77.72,8.38 90 top
U$56  [!RST_I]  77.72,8.38 90 bottom
U$57  [SPARKX-MEDIUM]  71.37,28.45 0 top
U$58  [SPARKX-MEDIUM]  71.37,28.45 0 bottom
U$59  [REFRIGERATION_GAS_SENSOR0]  61.85,26.04 0 top
U$60  [ZMOD44501]  66.67,24.38 0 top
U$61  [INT_O]  75.18,8.38 90 top
U$62  [INT_O]  75.18,8.38 90 bottom
U$63  [REFRIGERATION_GAS_SENSOR0]  81.15,26.04 0 bottom
U$64  [ZMOD44501]  76.07,24.38 0 bottom
U$65  [ADDR#_0X320]  76.33,22.73 0 bottom
U$66  [PRODUCTION_INSTRUCTIONS]  23.11,-3.3 0 top  (outside the outline)